# Altium PCB MIFA.PcbDoc (part 1 of 5)
Units mm, origin at the board's own origin, x right, y up, seen from the top; angles counter-clockwise.
Board outline 61 x 65 mm, 6 copper layers (Top Layer, Mid-Layer 1, Mid-Layer 2, Mid-Layer 3, Mid-Layer 4, Bottom Layer), stack 1.538 mm thick; 269 components, 171 nets, 1183 pads, 797 vias.
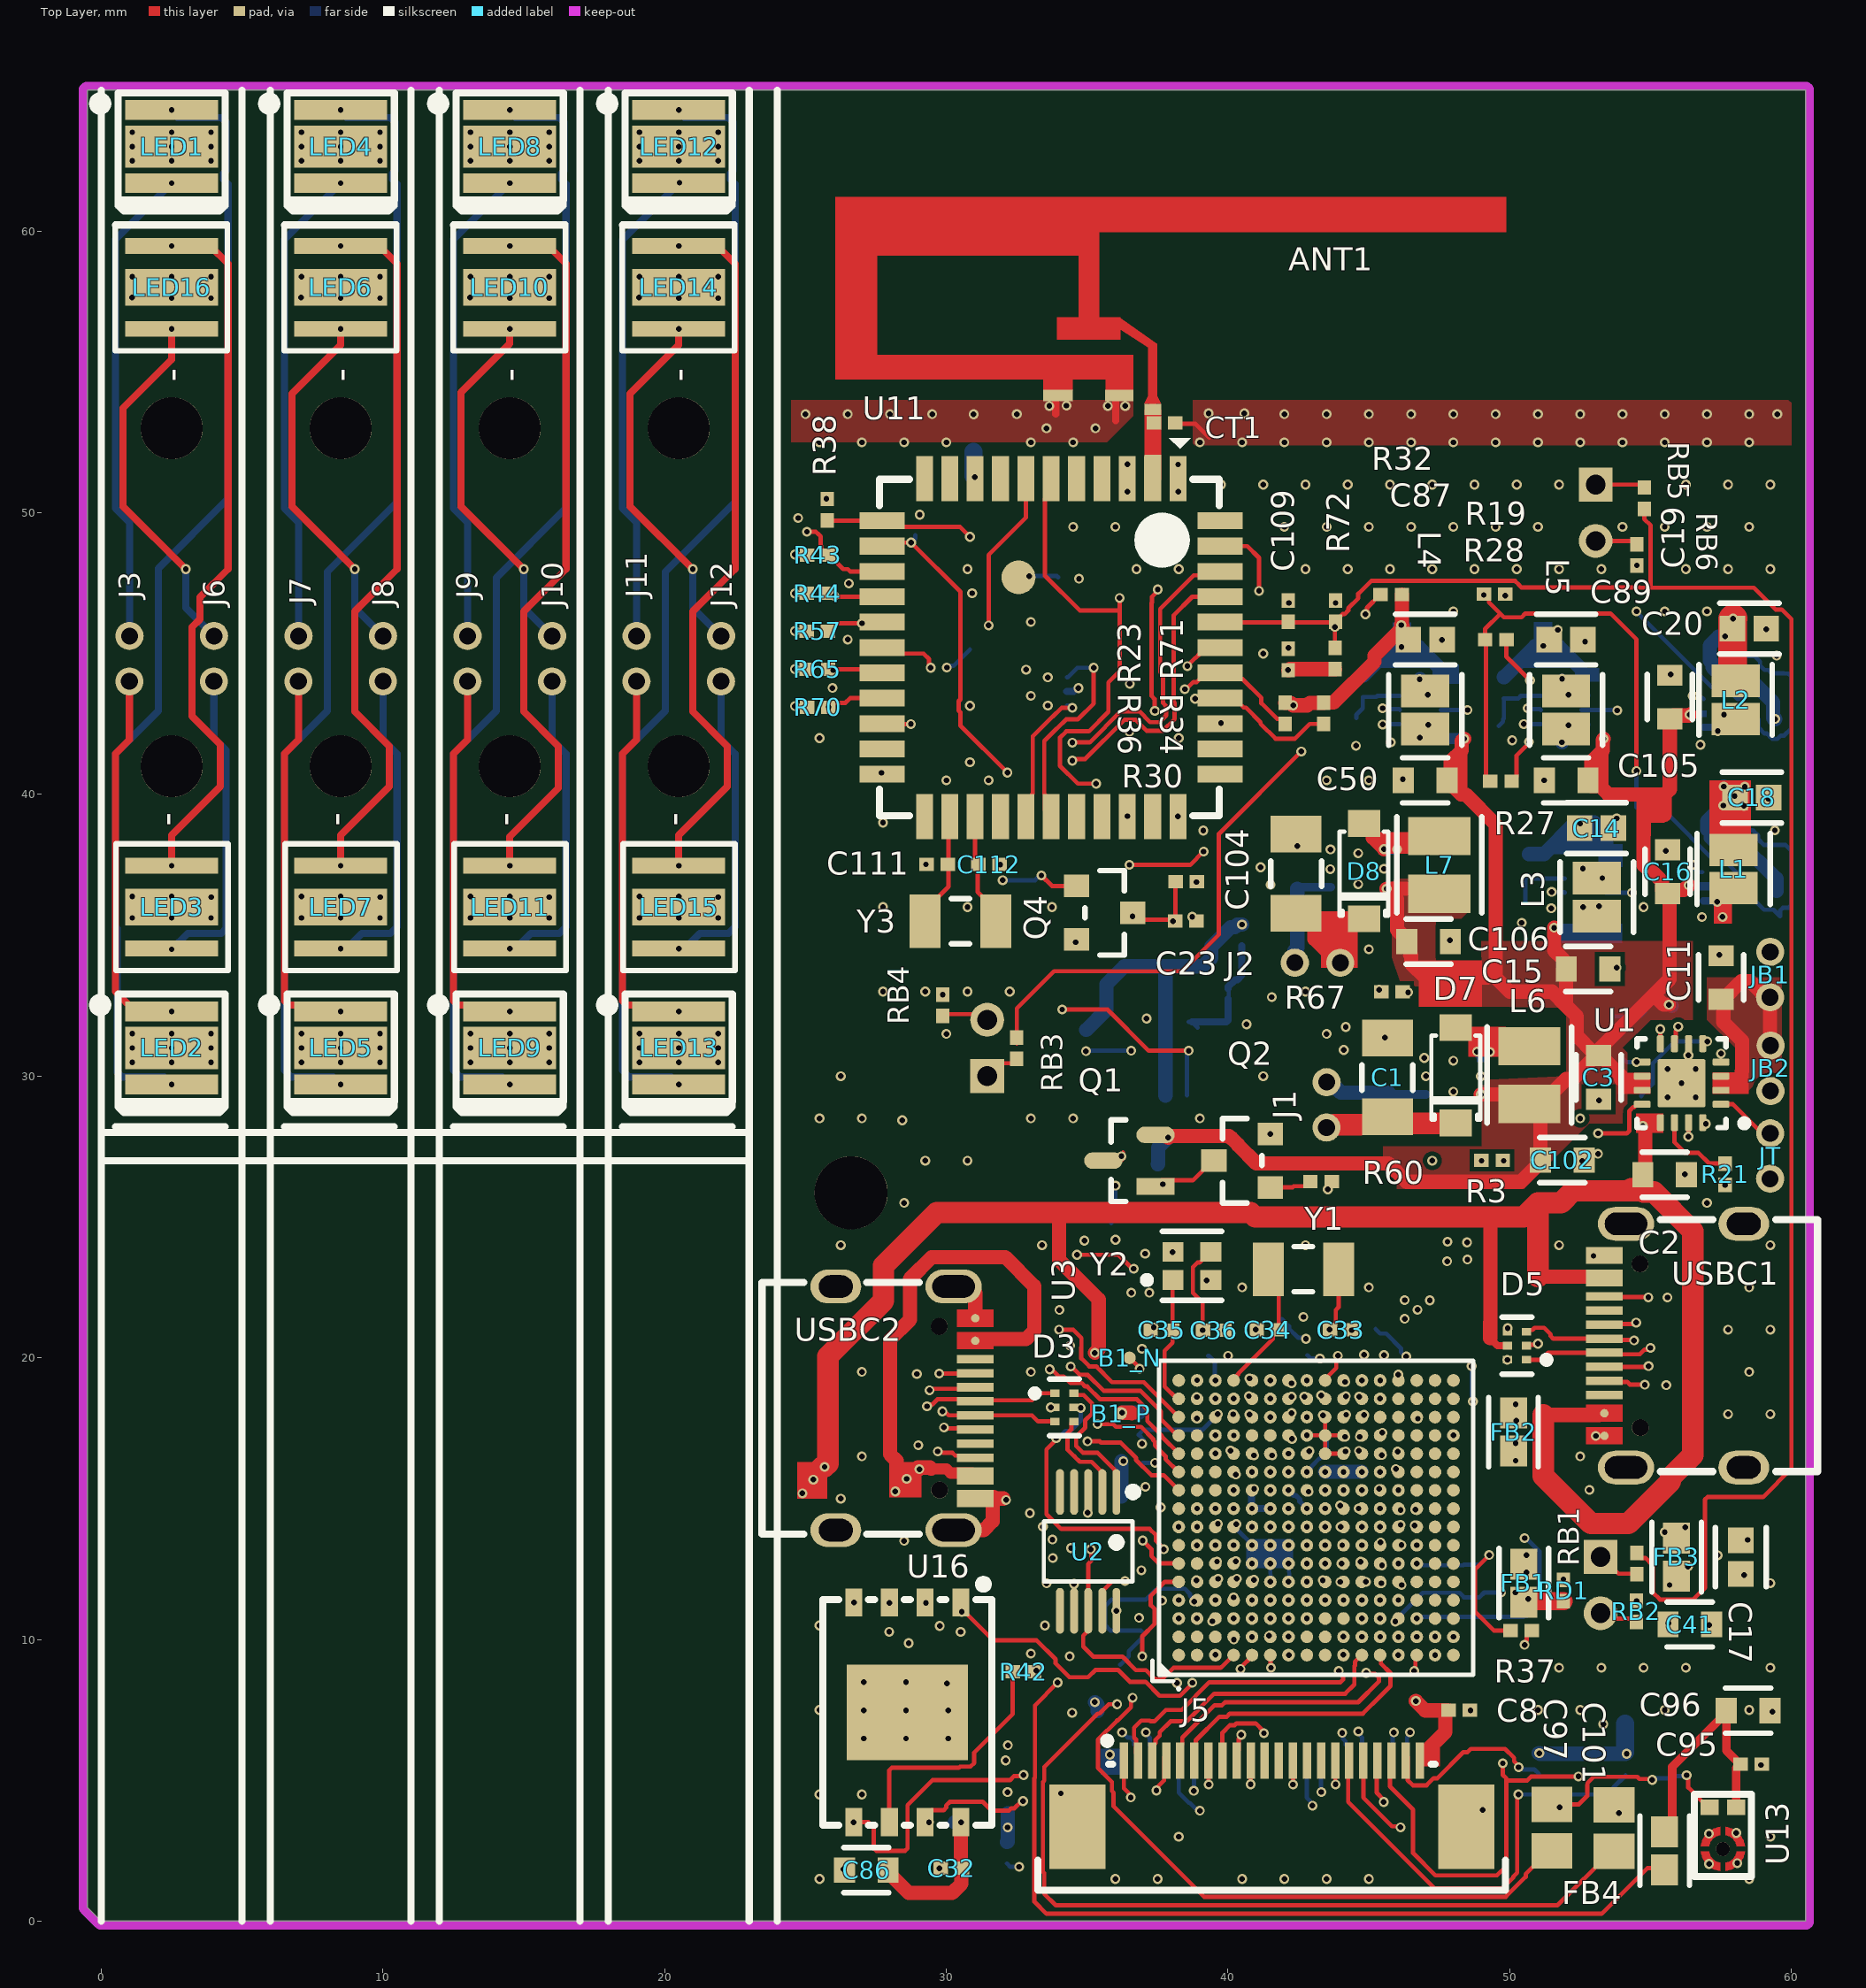
[diagram p0: Top Layer view]
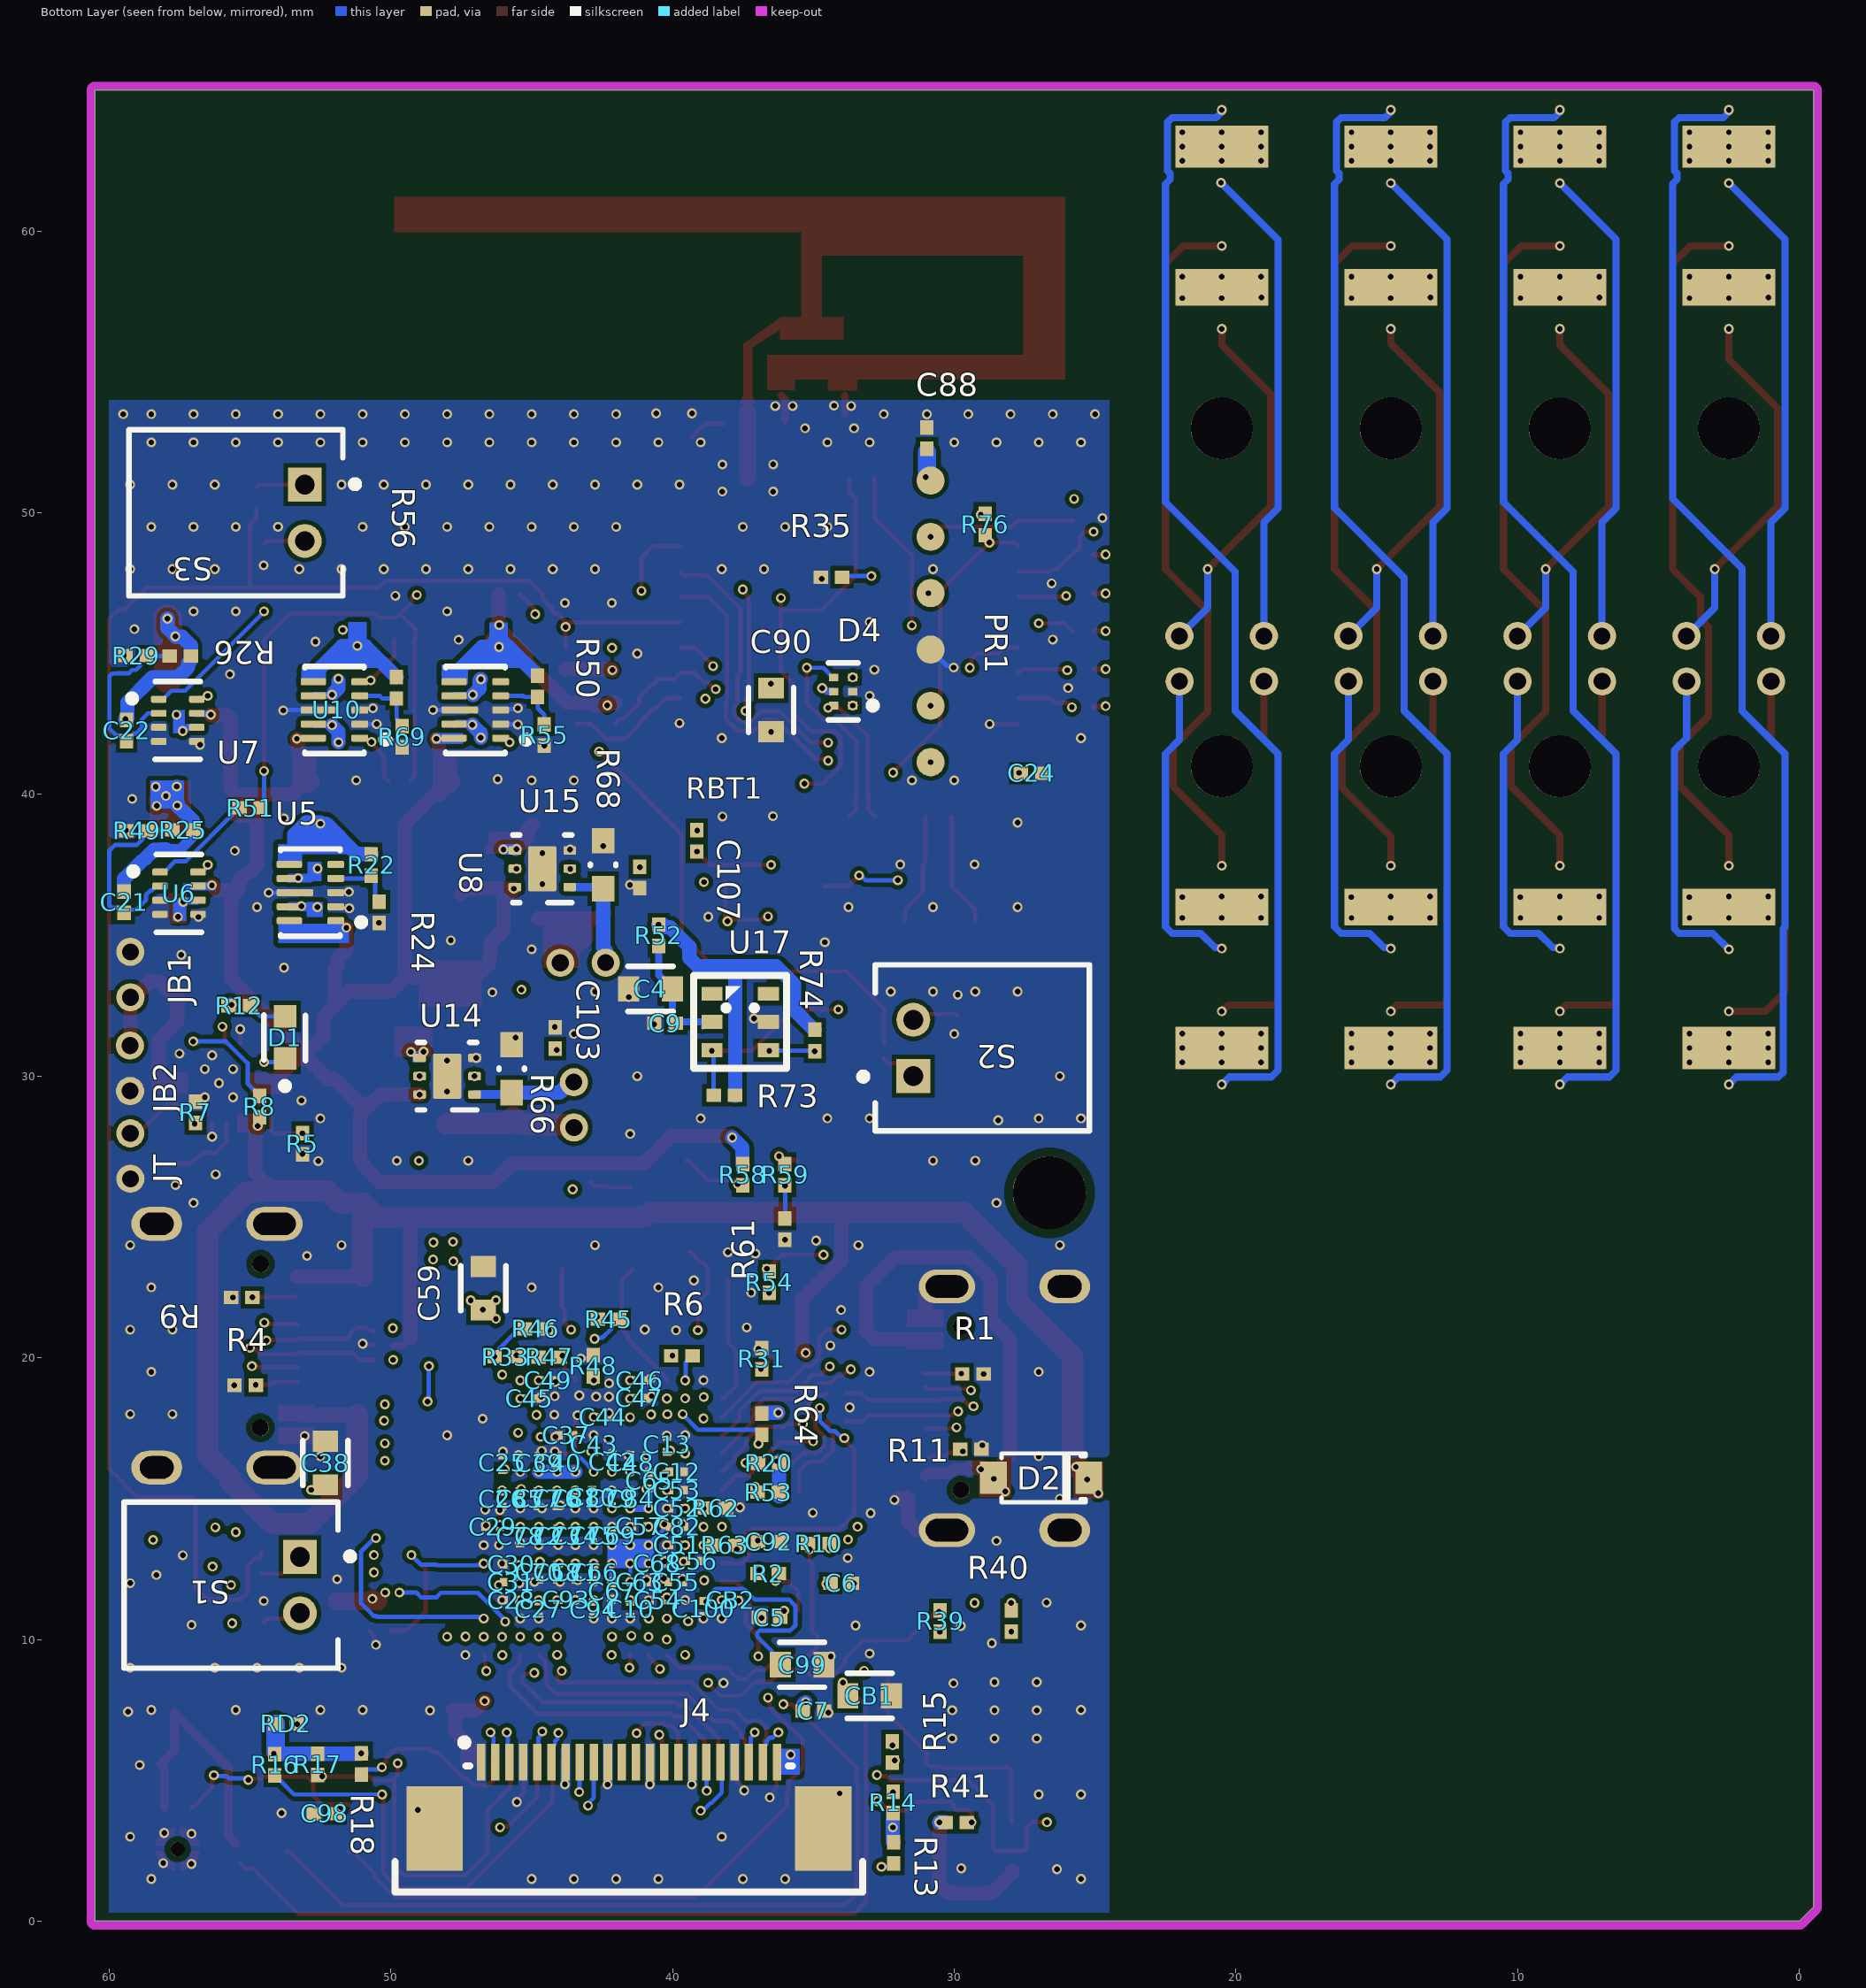
[diagram p1: Bottom Layer view, seen from below]
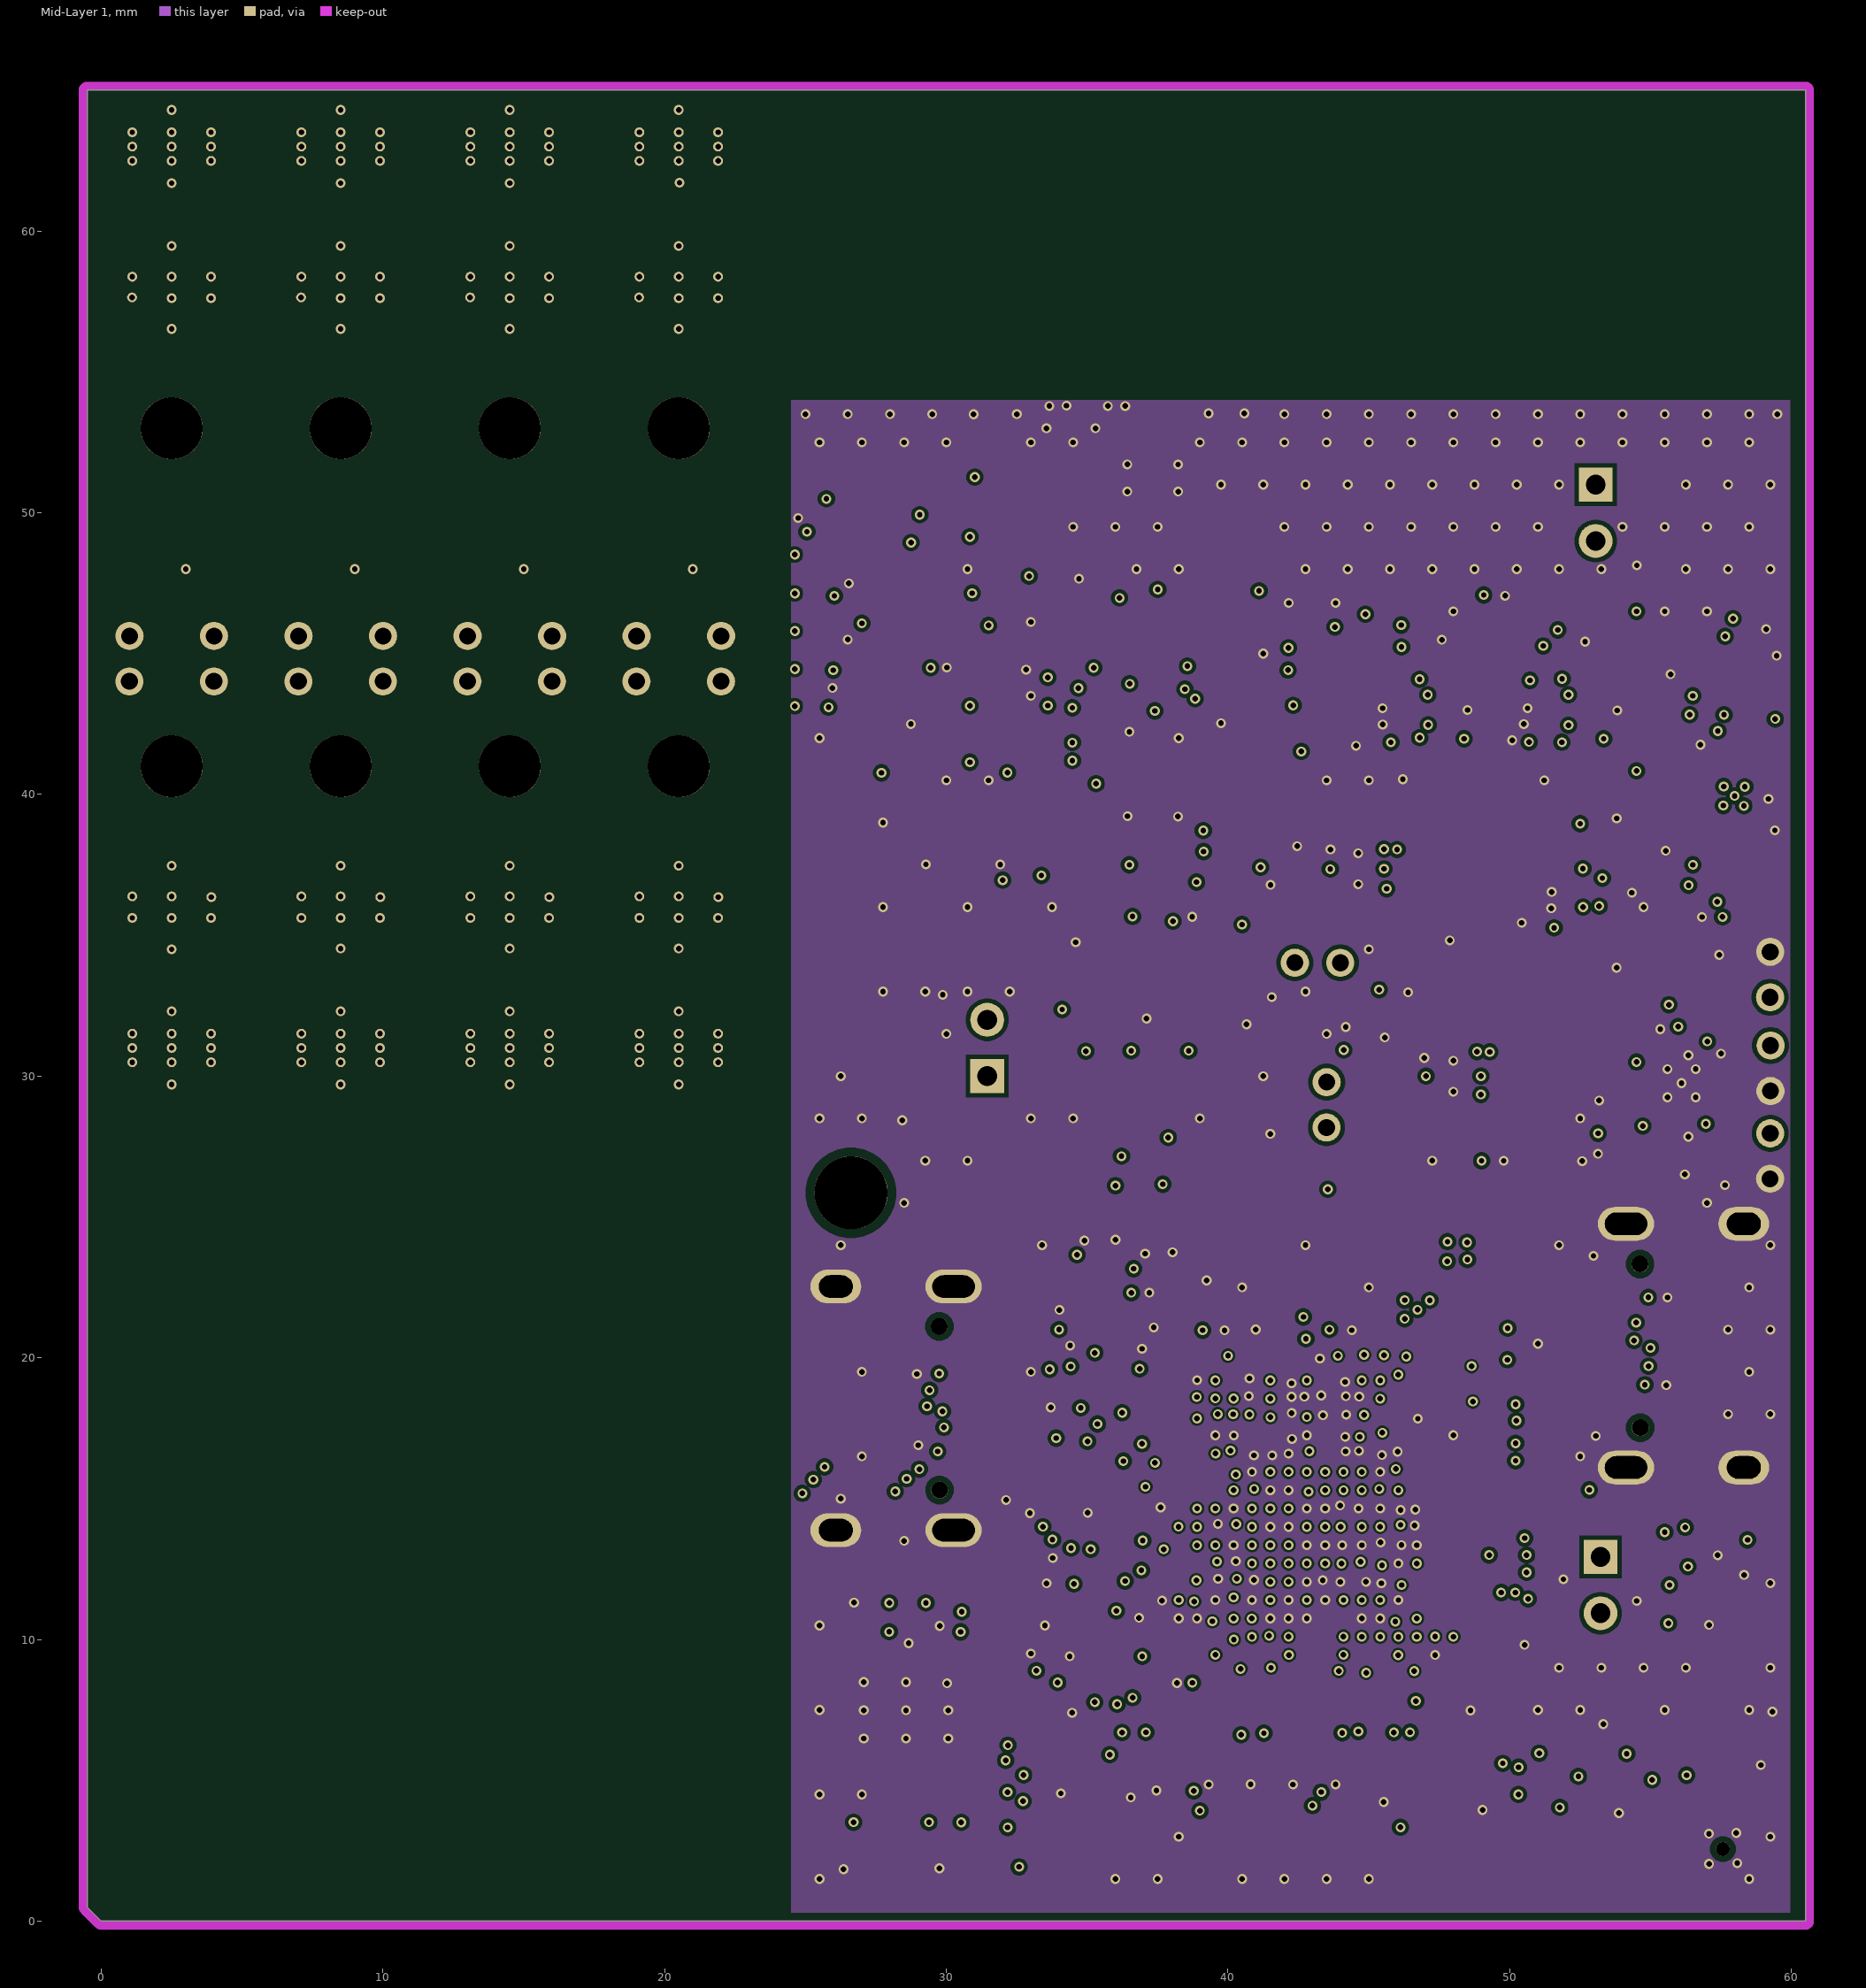
[diagram p2: Mid-Layer 1]
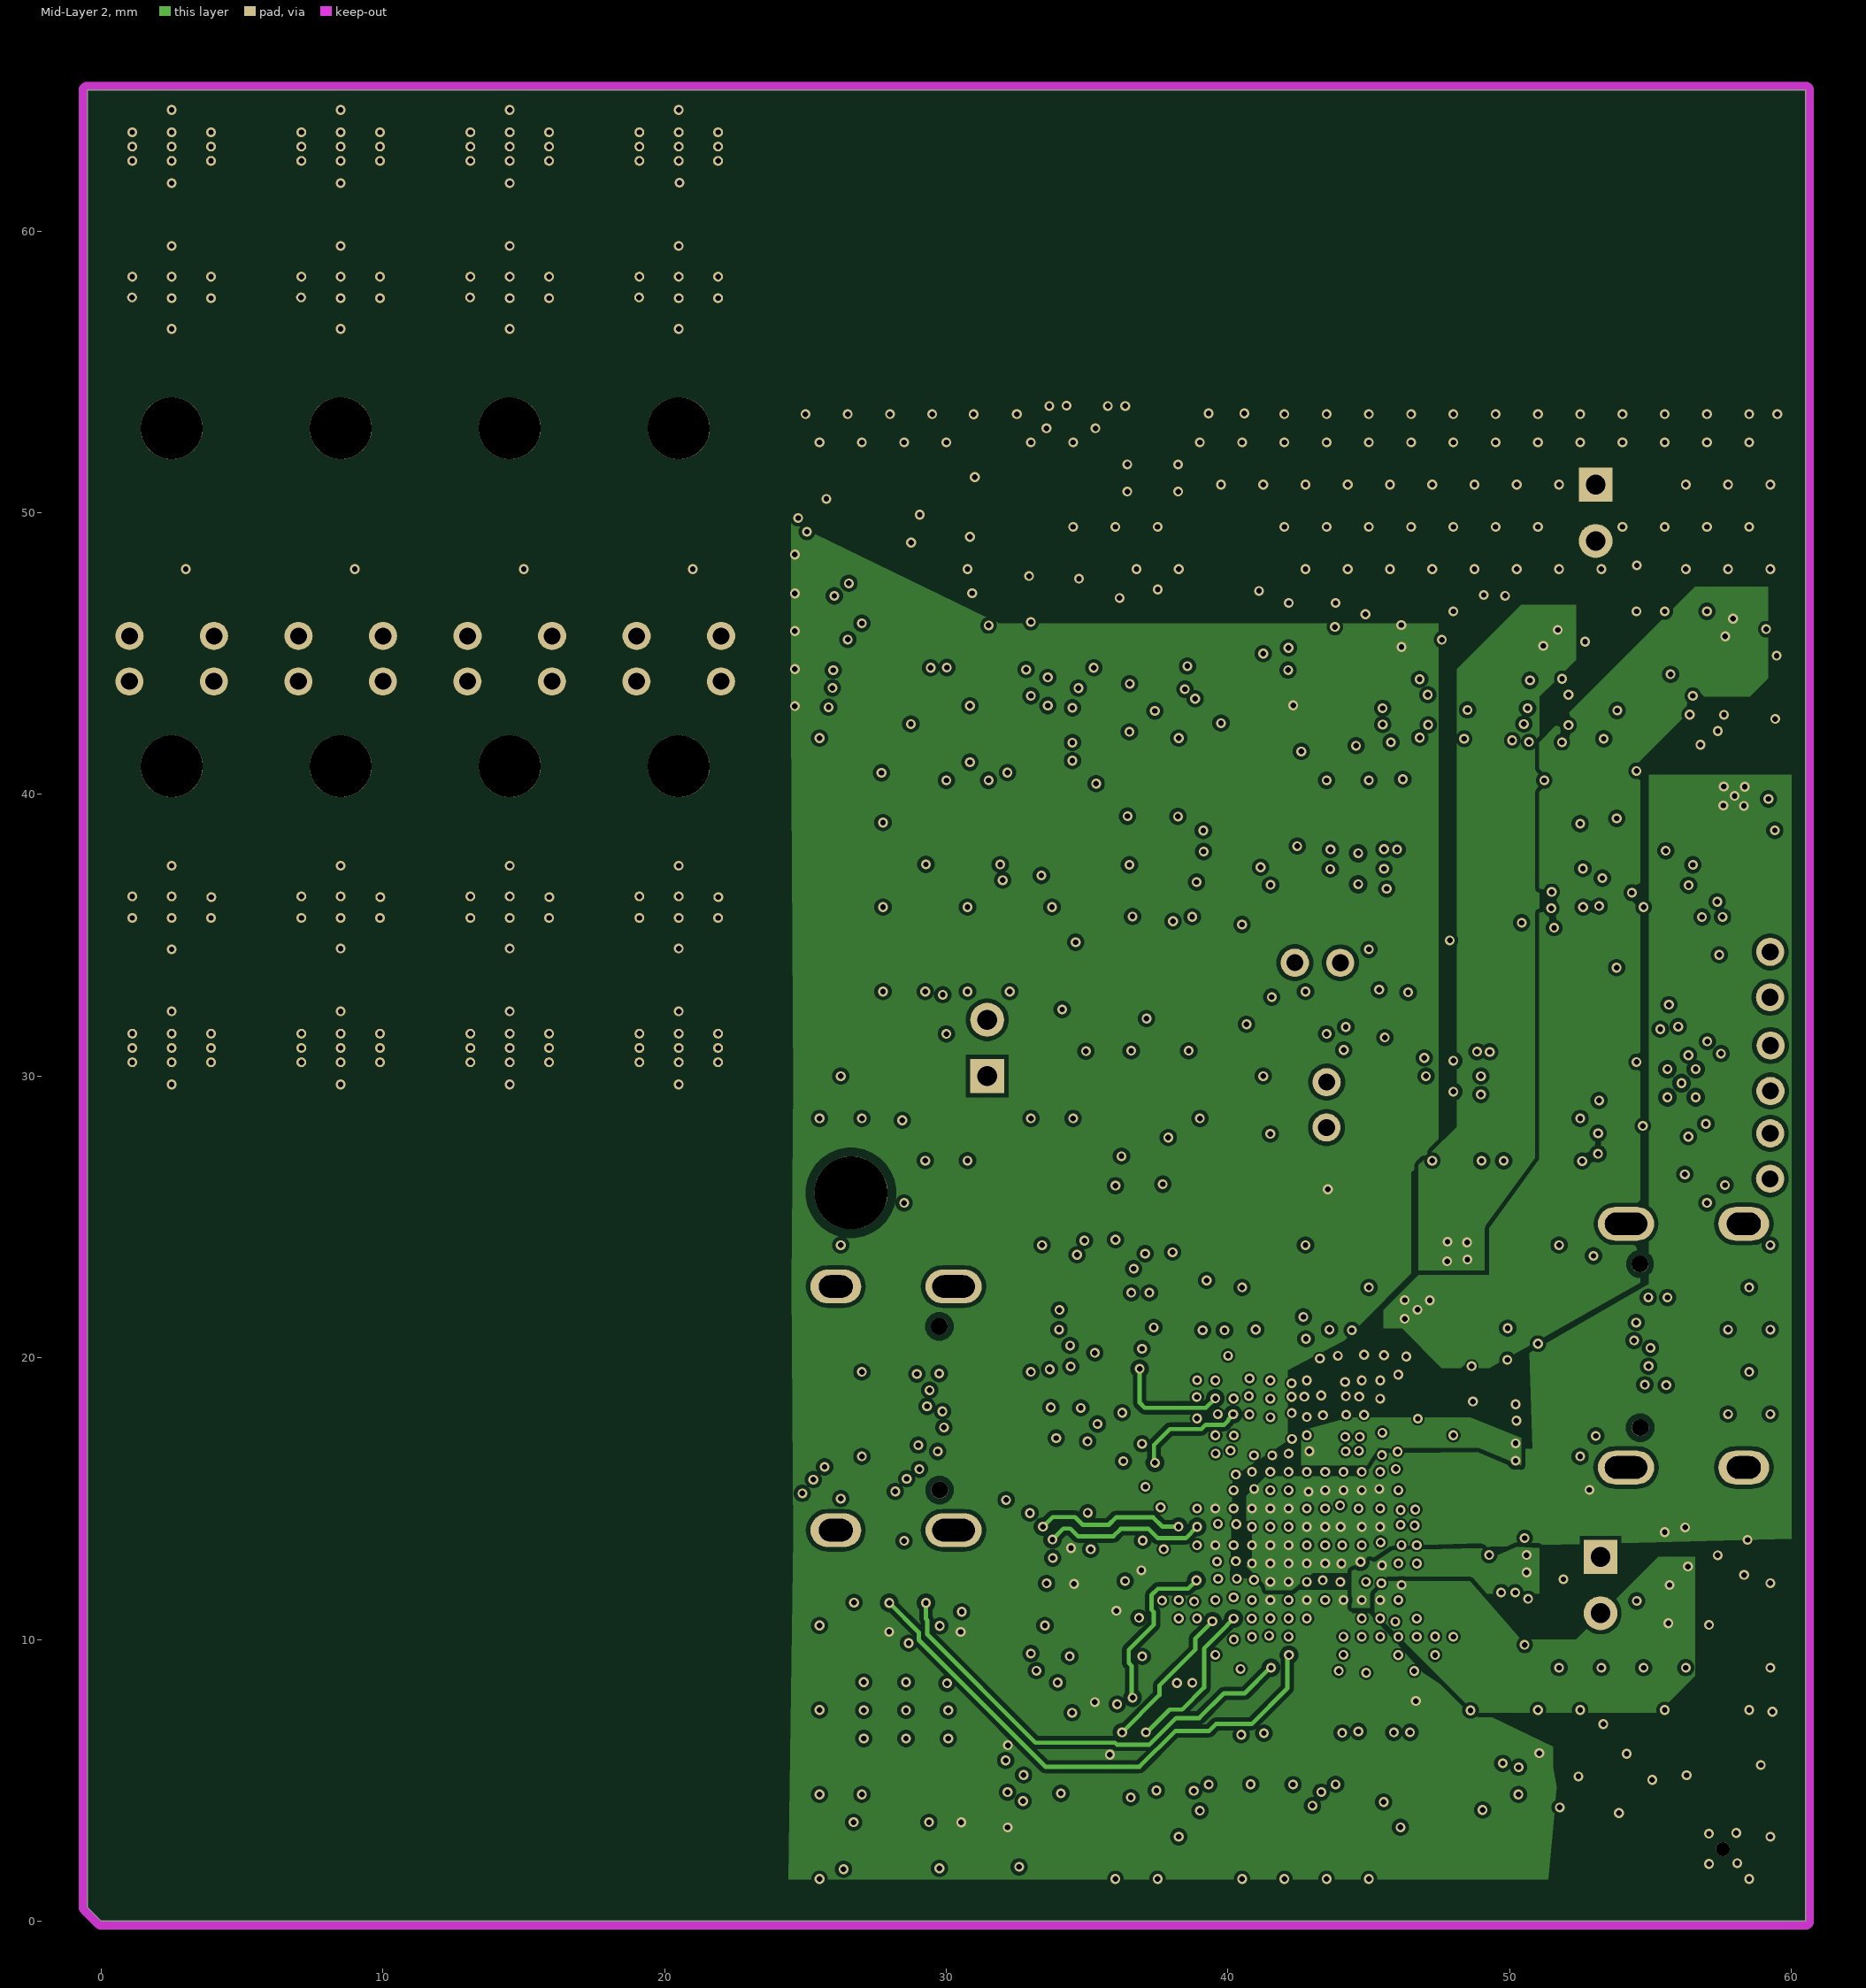
[diagram p3: Mid-Layer 2]
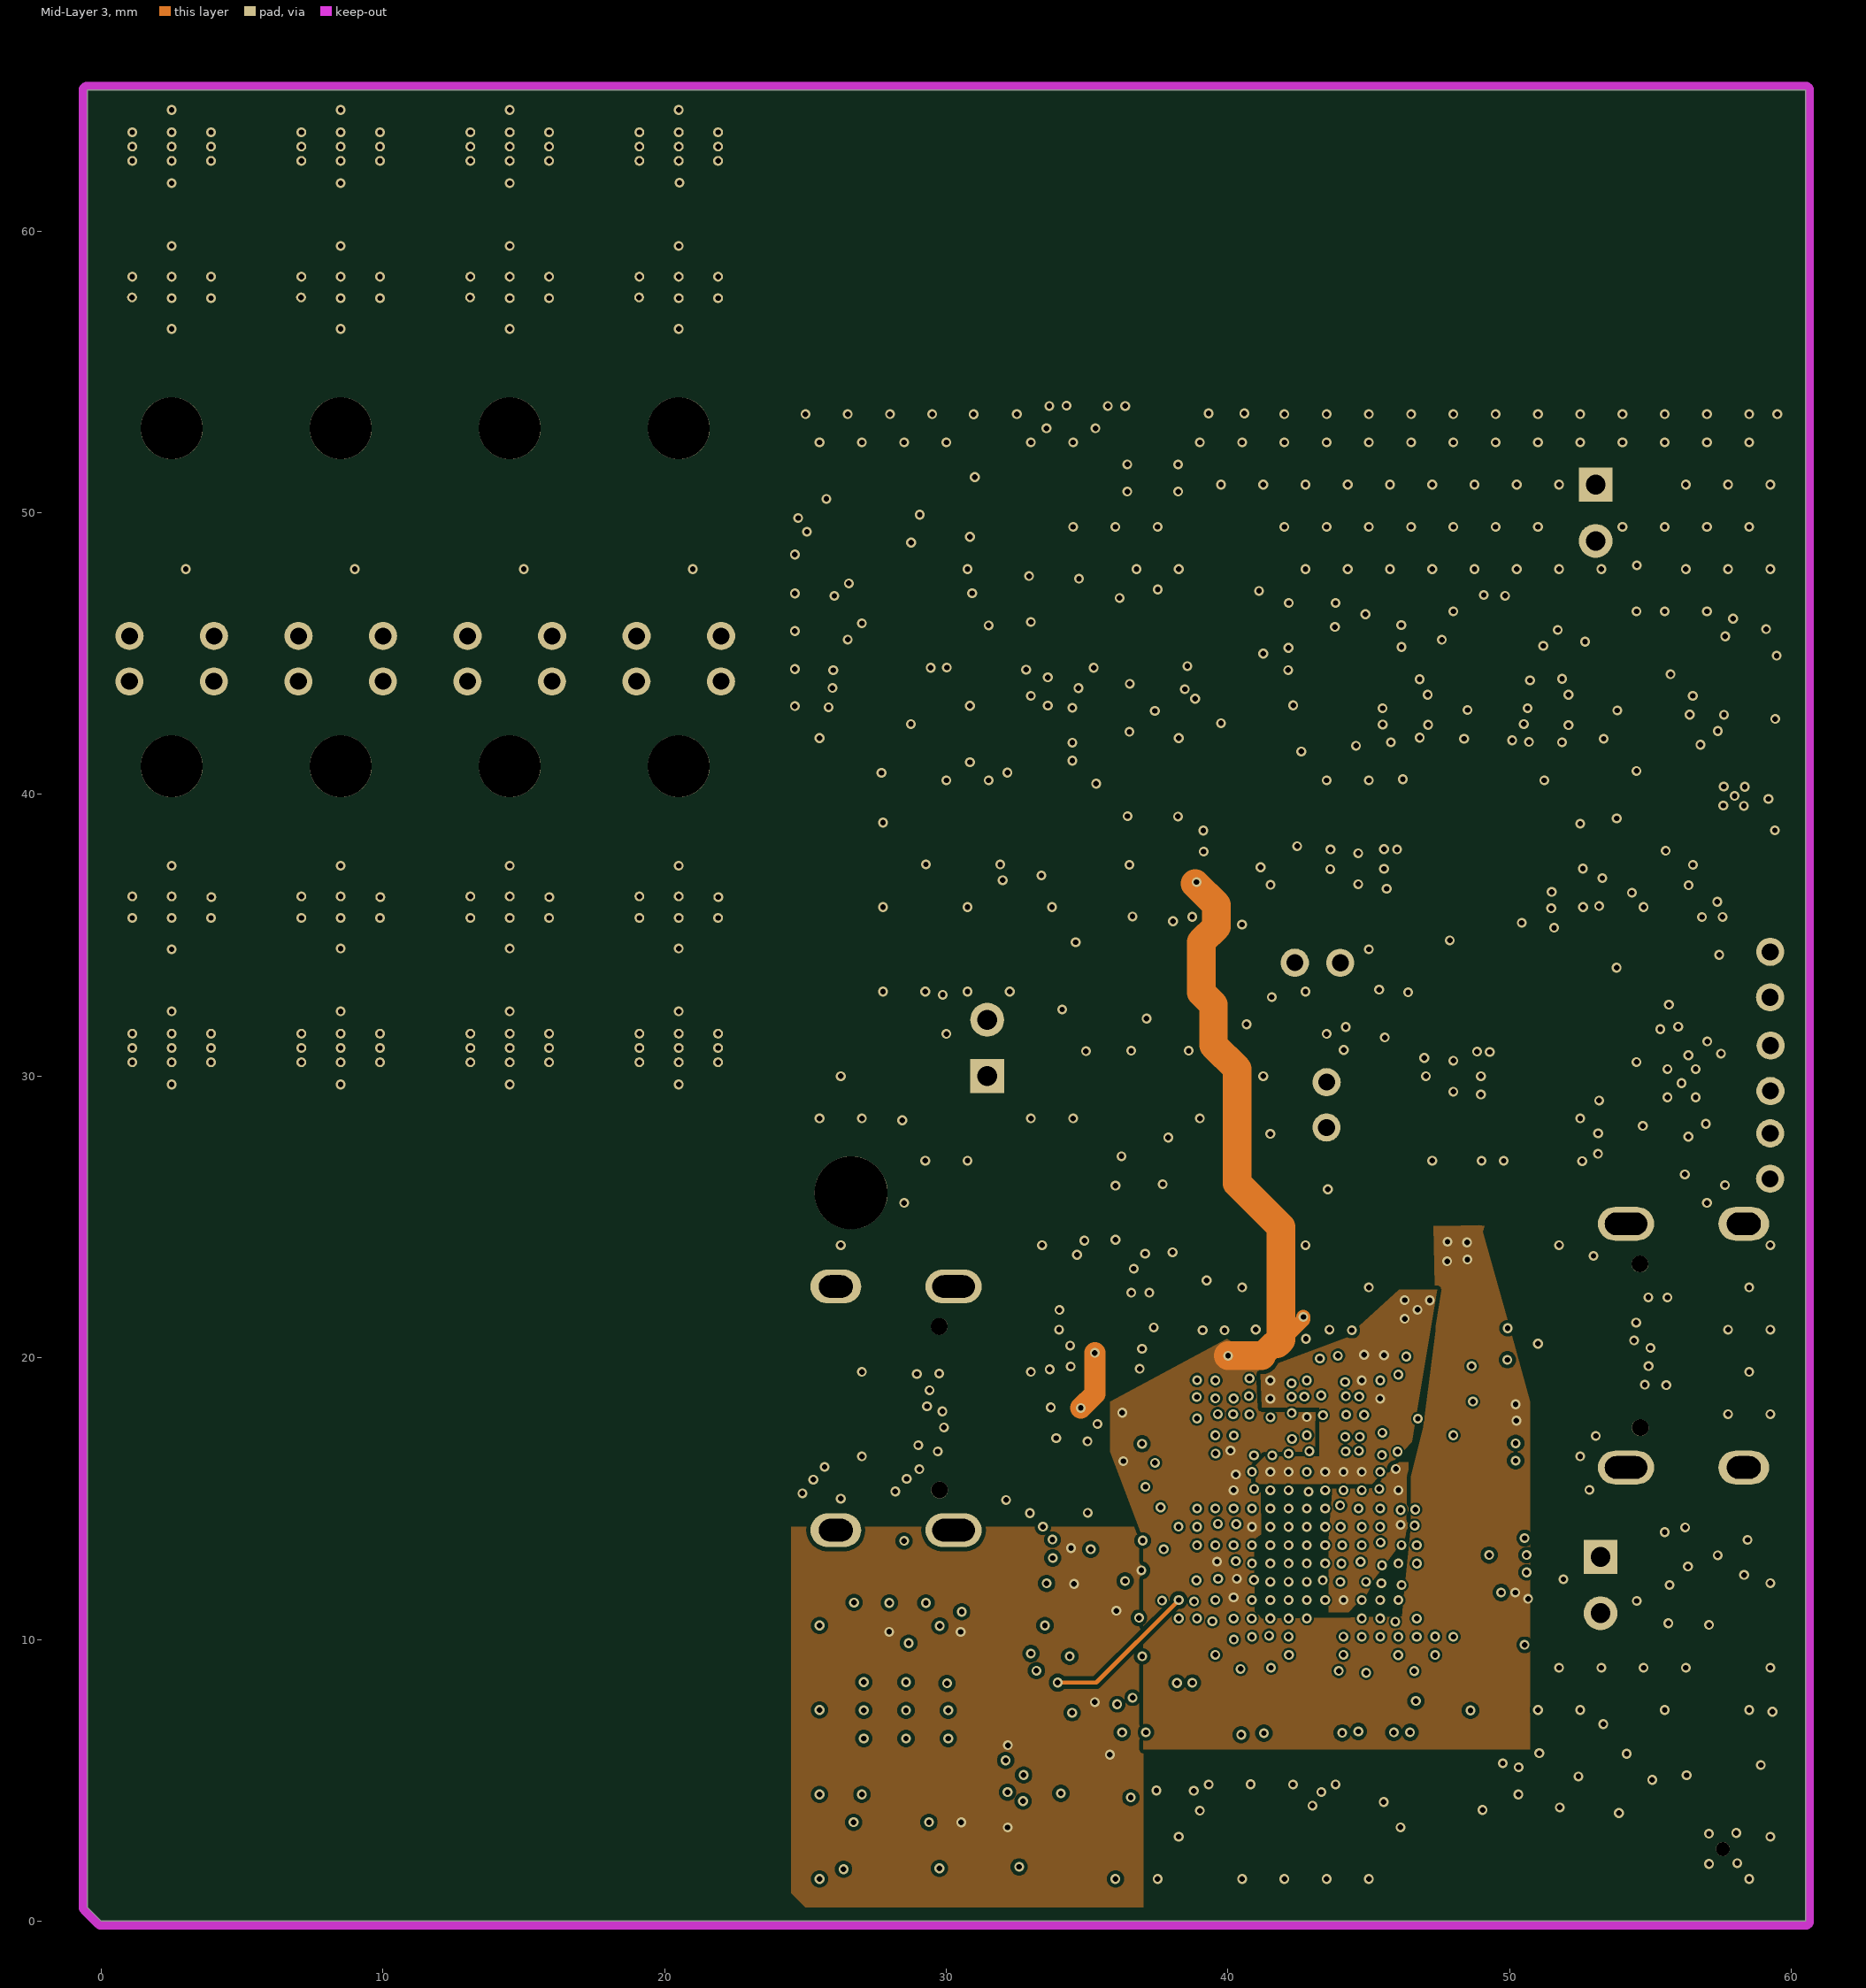
[diagram p4: Mid-Layer 3]
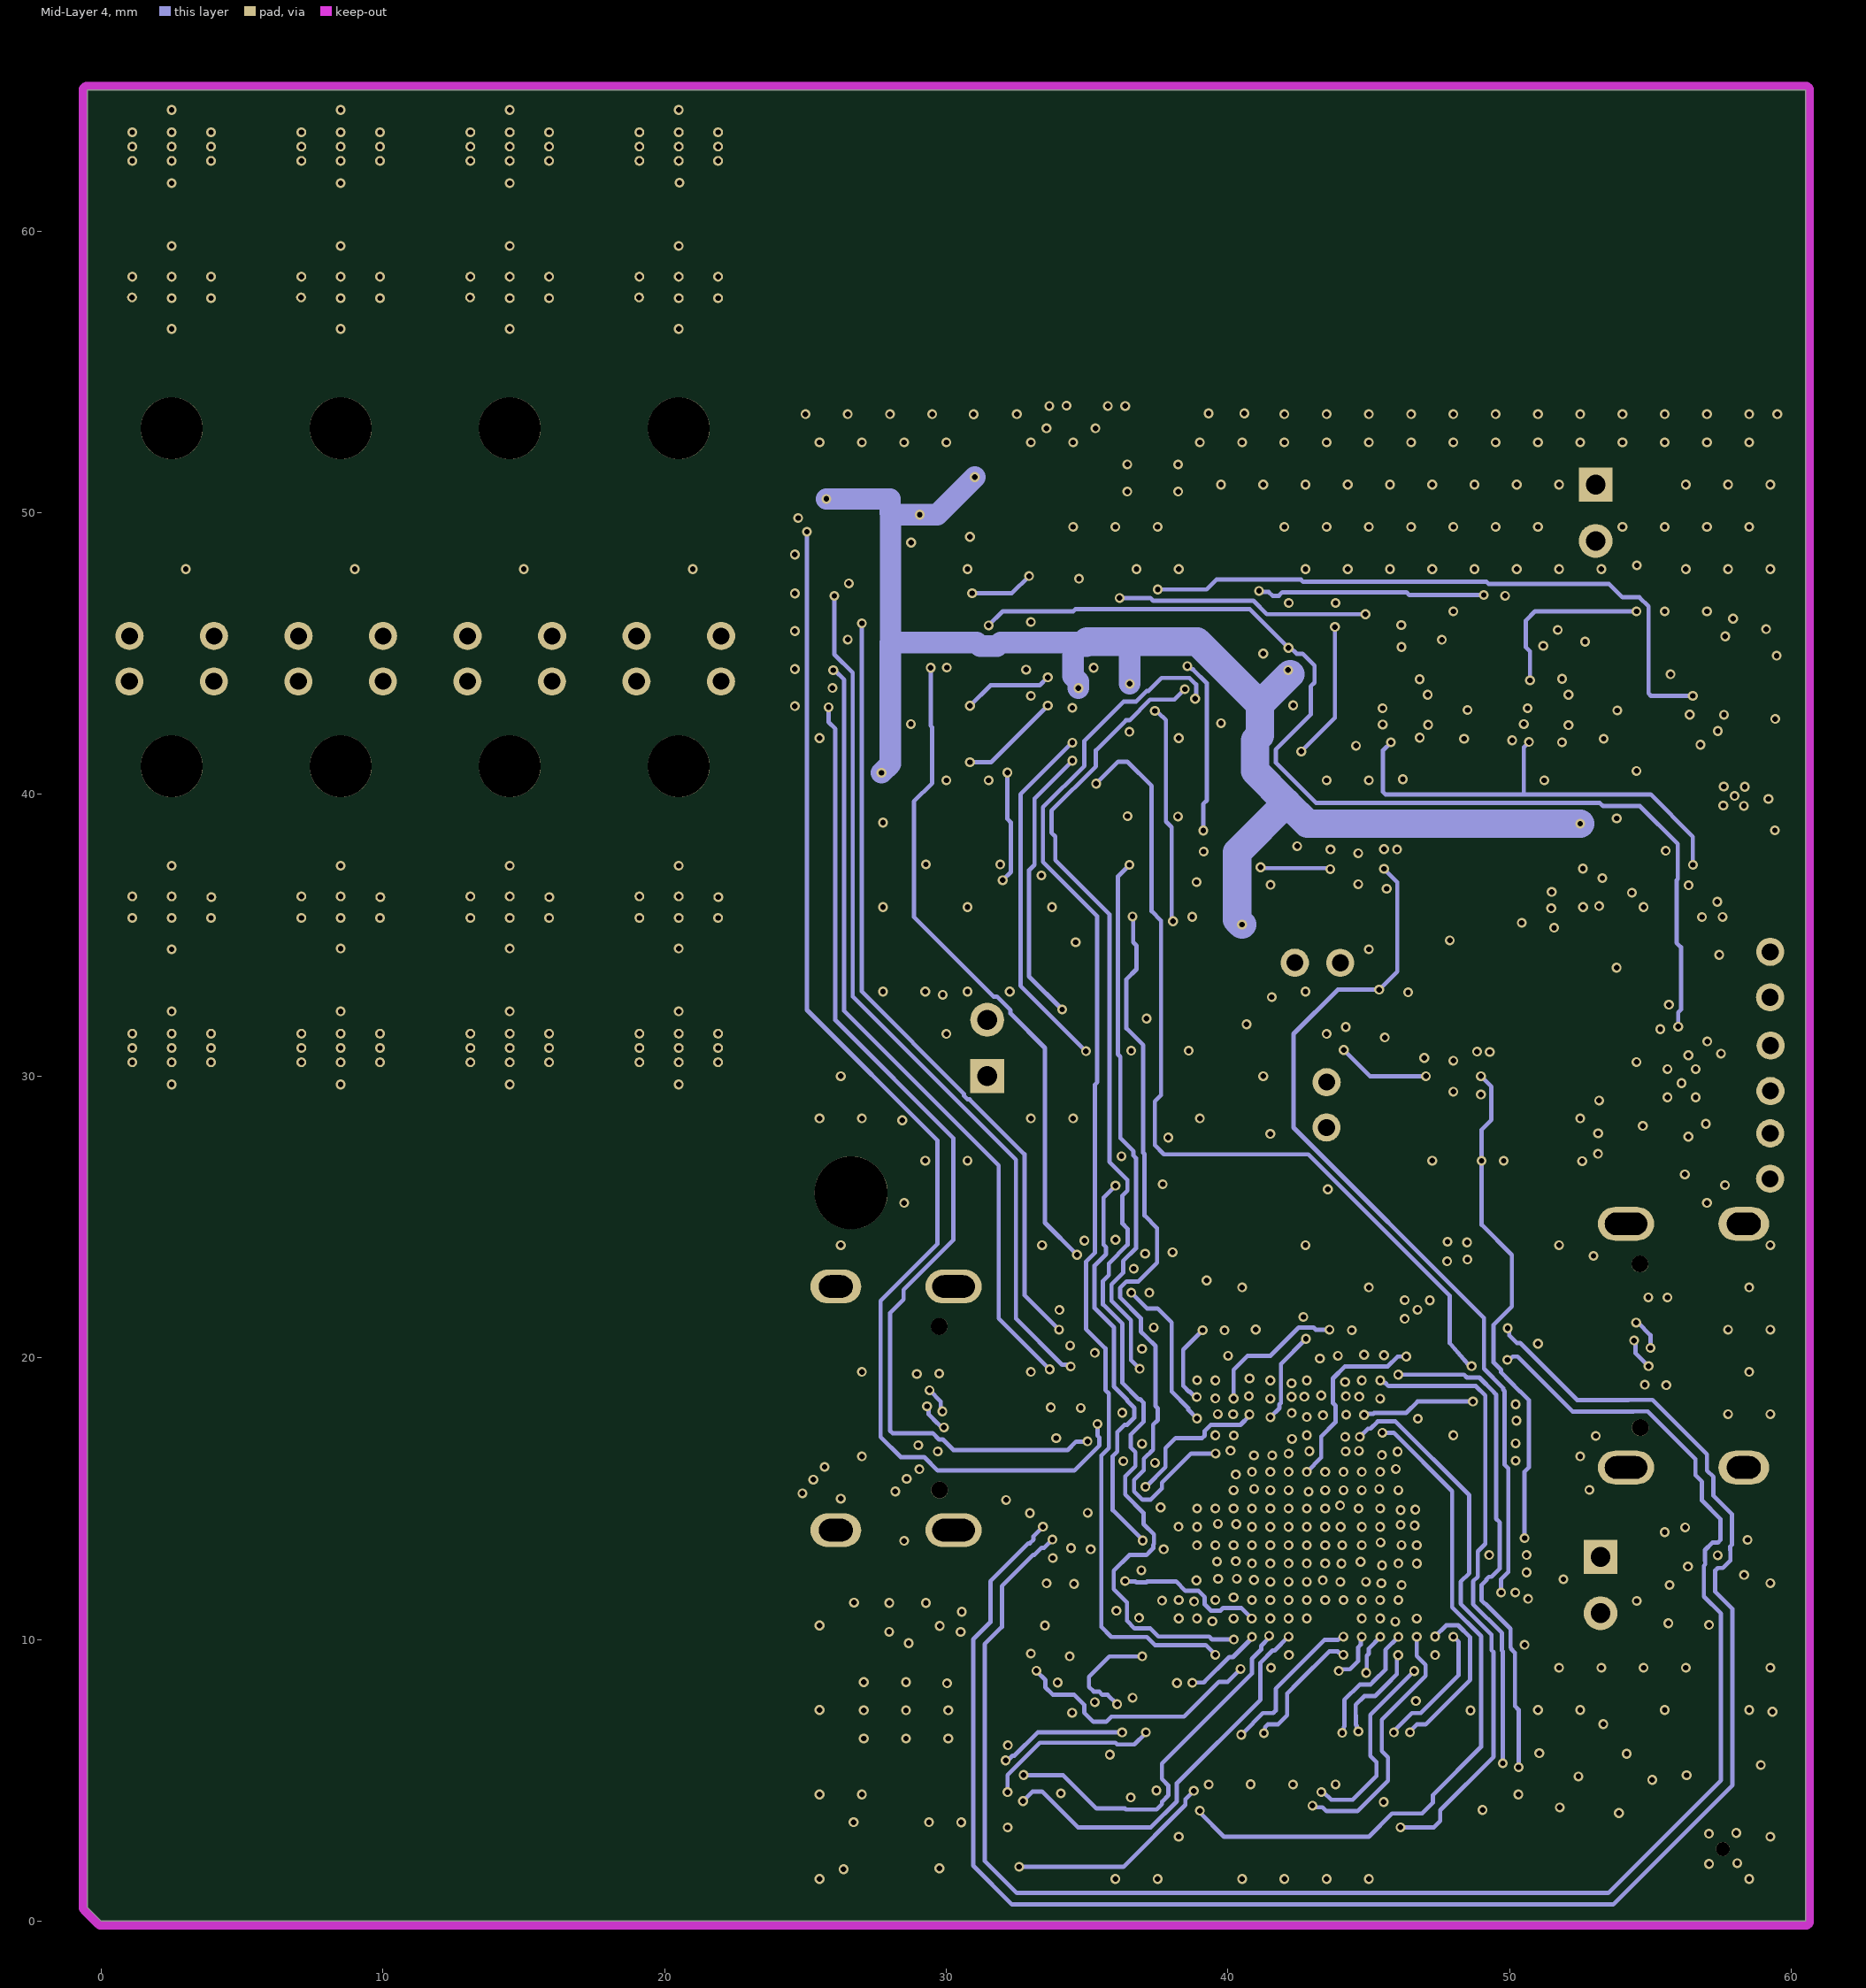
[diagram p5: Mid-Layer 4]
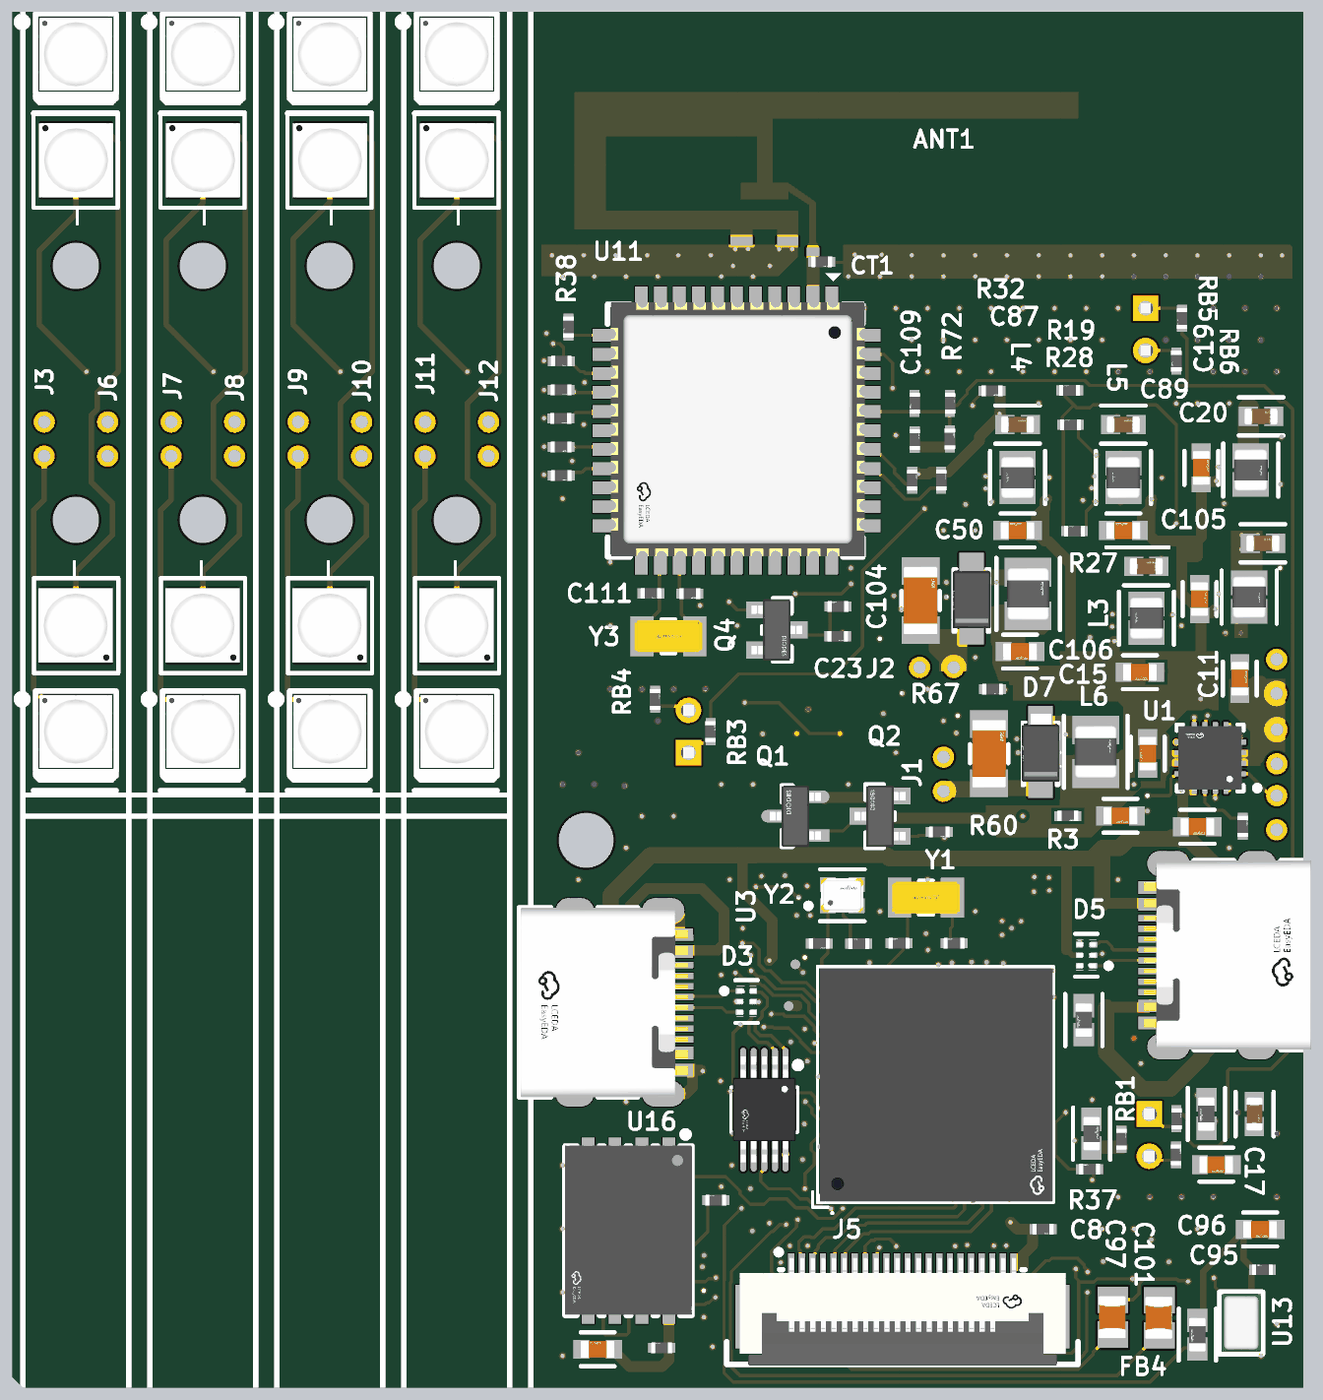
[diagram p8: 3D render of the assembled board from above, using the file's embedded part models]
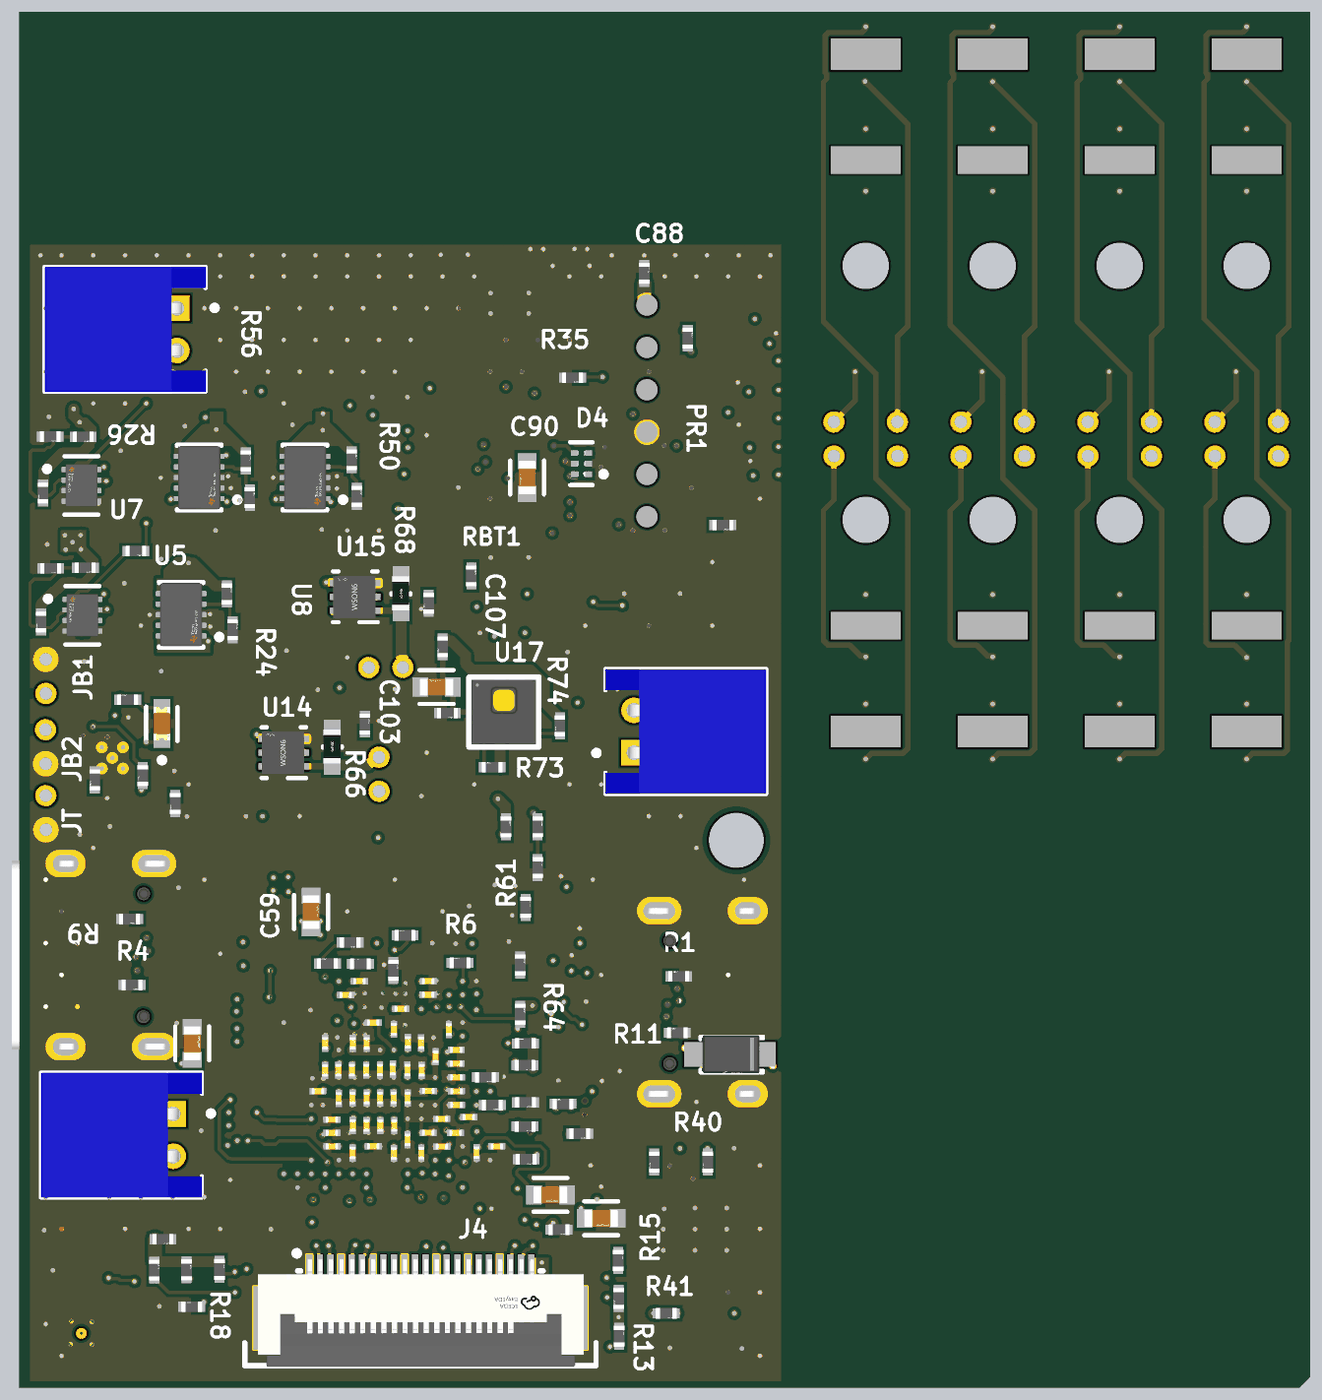
[diagram p9: 3D render of the assembled board from below, using the file's embedded part models]

## Layer stack, top to bottom
Top Solder: solder mask 0.0305, Solder Resist, Dk 3.8
Top Layer: signal copper 0.035
Dielectric 1: prepreg 0.0994, PP-3313, Dk 3.95
Mid-Layer 1: signal copper 0.0152
Dielectric 2: core 0.55, Core-055, Dk 4.4
Mid-Layer 2: signal copper 0.0152
Dielectric 3: prepreg 0.1088, PP-2116, Dk 4
Mid-Layer 3: signal copper 0.0152
Dielectric 4: core 0.55, Core-055, Dk 4.4
Mid-Layer 4: signal copper 0.0152
Dielectric 5: prepreg 0.0994, PP-3313, Dk 3.95
Bottom Layer: signal copper 0.035
Bottom Solder: solder mask 0.0305, Solder Resist, Dk 3.8

## Board outline
0,0 -0.5,0.5 -0.5,65 60.5,65 60.5,0

## Design rules (kind name [scope] priority, off if disabled: settings)
Clearance Clearance_1 [All vs IsPad AND (Name = 'Free-HOLE')] p1: gap=0.3 ignorepadtopadclearanceinfootprint=FALSE
Clearance Clearance_2 [All vs WithinRoom('BGA')] p2: gap=0.15 ignorepadtopadclearanceinfootprint=FALSE except(0.2: Arc-Hole Track-Hole SMDPad-Hole THPad-Hole Via-Hole Text-Hole)
Clearance [All] p3: gap=0.15 ignorepadtopadclearanceinfootprint=FALSE except(0.2: Arc-Hole Track-Hole SMDPad-Hole THPad-Hole Via-Hole Fill-Hole Poly-Hole Region-Hole Text-Hole)
DiffPairsRouting [All] p1: maxlimit=0.254 minlimit=0.254 mostfreqgap=0.254 toplayer_minwidth=0.152 toplayer_maxwidth=0.381 toplayer_prefwidth=0.152 midlayer1_minwidth=0.152 midlayer1_maxwidth=0.381 midlayer1_prefwidth=0.152 midlayer2_minwidth=0.152 midlayer2_maxwidth=0.381 midlayer2_prefwidth=0.152 midlayer3_minwidth=0.152 midlayer3_maxwidth=0.381 midlayer3_prefwidth=0.152 midlayer4_minwidth=0.152 midlayer4_maxwidth=0.381 midlayer4_prefwidth=0.152 bottomlayer_minwidth=0.152 bottomlayer_maxwidth=0.381 bottomlayer_prefwidth=0.152 maxuncoupledlength=12.7
HoleSize [All] p1: absolutevalues=TRUE maxlimit=3.515 minlimit=0.2 maxpercent=80.000 minpercent=20.000
HoleToHoleClearance [All] p1: gap=0.251 allowstackedmicrovias=TRUE
MinimumSolderMaskSliver [All] p1: minsoldermaskwidth=0.003
PlaneClearance PlaneClearance_1 [All] p1: clearance=0.102
PolygonConnect [All] p1: connectstyle=Direct reliefconductorwidth=0.254 reliefentries=4 polygonreliefangle="90 Angle" airgapwidth=0.254
RoomDefinition BGA [False] p1: confinementstyle=ConfineIn formatcopy=TRUE lockcomponents=FALSE outline 37,20.5 49,20.5 49,8.5 37,8.5
RoutingVias [All] p1: holewidth=0.2 width=0.35 viastyle="Through Hole" minholewidth=0.2 minwidth=0.35 maxholewidth=0.2 maxwidth=0.35
SilkToSilkClearance [All] p1: silktosilkclearance=0.051
SilkToSolderMaskClearance [IsPad] p1: minsilkscreentomaskgap=0.04 clearancetoexposedcopper=TRUE
SolderMaskExpansion [All] p1: expansion=0.102 istentingtop=FALSE
SupplyNets "Schematic Supply Nets_10" [InNet('1V8_MIPI')] p1: voltage=0.000
SupplyNets "Schematic Supply Nets_9" [InNet('3V3_SLEEP')] p2: voltage=0.000
SupplyNets "Schematic Supply Nets_8" [InNet('0V8_MIPI')] p3: voltage=0.000
SupplyNets "Schematic Supply Nets_7" [InNet('3V3')] p4: voltage=0.000
SupplyNets "Schematic Supply Nets_6" [InNet('VBAT')] p5: voltage=0.000
SupplyNets "Schematic Supply Nets_5" [InNet('1V8_DDR')] p6: voltage=0.000
SupplyNets "Schematic Supply Nets_4" [InNet('VUSB')] p7: voltage=0.000
SupplyNets "Schematic Supply Nets_3" [InNet('1V1')] p8: voltage=0.000
SupplyNets "Schematic Supply Nets_2" [InNet('0V8')] p9: voltage=0.000
SupplyNets "Schematic Supply Nets_1" [InNet('1V8')] p10: voltage=0.000
SupplyNets "Schematic Supply Nets" [InNet('GND')] p11: voltage=0.000
Width [InNet('3V3') or InNet('3V3_SLEEP') or InNet('NetD2_2') or InNet('VUSB') or InNet('BAT') or InNet('VBAT') or InNet('NetL3_1') or InNet('NetL3_2') or InNet('0V8') or InNet('1V1') or InNet('1V8')] p1: maxlimit=3.048 minlimit=0.152 preferedwidth=0.762
Width Width_1 [All] p2: maxlimit=3.81 minlimit=0.152 preferedwidth=0.152
23 further rules are at their usual default settings.

## Classes and differential pairs
differential pair class USB: USB_D USBP_D
differential pair class USBD: AI_D AIP_D
differential pair class CAMC: CAM1_C CAM2_C
differential pair class CAM1: CAM1_D1 CAM2_D1
differential pair class CAM0: CAM1_D0 CAM2_D0
component class WIFI: q
differential pair USBP_D: +USBP_D_P -USBP_D_N
differential pair USB_D: +USB_D_P -USB_D_N
differential pair CAM2_D1: +CAM2_D1_P -CAM2_D1_N
differential pair CAM2_D0: +CAM2_D0_P -CAM2_D0_N
differential pair CAM2_C: +CAM2_C_P -CAM2_C_N
differential pair CAM1_D1: +CAM1_D1_P -CAM1_D1_N
differential pair CAM1_D0: +CAM1_D0_P -CAM1_D0_N
differential pair CAM1_C: +CAM1_C_P -CAM1_C_N
differential pair AIP_D: +AIP_D_P -AIP_D_N
differential pair AI_D: +AI_D_P -AI_D_N

## Components (designator, comment, footprint, x,y, rotation, side; value= is the part's Value field where it differs from the comment)
ANT1 "MIFI" IFA_MAGUS 32.353,56.811 r0 top net-tie
B1_N "TESTP" TESTP 36.475,20 r90 top
B1_P "TESTP" TESTP 36.16,18.024 r90 top
C1 "1uF 50V 1206" FP-1206-L_3_2_0_2-W_1_6_0-IPC_B 45.657,29.952 r90 top value=1uF
C2 "10uF GRM188R61A106ME69D" FP-GRM188-0_15-MFG 55.5,26.5 r0 top value=10uF
C3 "10uF GRM188R61A106ME69D" FP-GRM188-0_15-MFG 53.15,29.955 r270 top value=10uF
C4 "10uF GRM188R61A106ME69D" FP-GRM188-0_15-MFG 40.781,33.1 r0 bottom value=10uF
C5 "100n" CAP_0402 36.551,10.78 r180 bottom value=100nF
C6 "100n" CAP_0402 34.014,11.996 r180 bottom value=100nF
C7 "100n" CAP_0402 34.995,7.457 r180 bottom value=100nF
C8 "100n" CAP_0402 48.207,7.484 r0 top value=100nF
C9 "100n" CAP_0402 40.267,31.869 r180 bottom value=100nF
C10 "100n 0201" CAP_0201 41.499,11.074 r270 bottom value=100nF
C11 "10uF GRM188R61A106ME69D" FP-GRM188-0_15-MFG 57.5,33.5 r90 top value=10uF
C12 "100n 0201" CAP_0201 39.85,15.956 r180 bottom value=100nF
C13 "100n 0201" CAP_0201 40.2,16.921 r90 bottom value=100nF
C14 "22uF GRM188R60J226MEA0J" FP-GRM188-0_2-IPC_C 53.081,38.803 r0 top value=22uF
C15 "10uF GRM188R61A106ME69D" FP-GRM188-0_15-MFG 52.782,33.8 r0 top value=10uF
C16 "10uF GRM188R61A106ME69D" FP-GRM188-0_15-MFG 55.603,37.257 r90 top value=10uF
C17 "22uF GRM188R60J226MEA0J" FP-GRM188-0_2-IPC_C 58.2,12.925 r270 top value=22uF
C18 "22uF GRM188R60J226MEA0J" FP-GRM188-0_2-IPC_C 58.594,39.891 r0 top value=22uF
C19 "10uF GRM188R61A106ME69D" FP-GRM188-0_15-MFG 55.684,43.457 r90 top value=10uF
C20 "22uF GRM188R60J226MEA0J" FP-GRM188-0_2-IPC_C 58.507,45.886 r0 top value=22uF
C21 "100pf" CAP_0402 59.471,36.175 r270 bottom value=100pF
C22 "100pf" CAP_0402 59.379,42.27 r270 bottom value=100pF
C23 "100n" CAP_0402 38.5,35.5 r0 top value=100nF
C24 "100n" CAP_0402 27.252,40.752 r180 bottom value=100nF
C25 "100n 0201" CAP_0201 46.047,16.273 r90 bottom value=100nF
C26 "100n 0201" CAP_0201 46.047,14.987 r270 bottom value=100nF
C27 "100n 0201" CAP_0201 44.747,11.087 r270 bottom value=100nF
C28 "100n 0201" CAP_0201 45.722,11.398 r0 bottom value=100nF
C29 "100n 0201" CAP_0201 46.386,14.004 r0 bottom value=100nF
C30 "100n 0201" CAP_0201 45.727,12.662 r0 bottom value=100nF
C31 "100n 0201" CAP_0201 45.728,12.039 r180 bottom value=100nF
C32 "100n" CAP_0402 30.183,1.882 r180 top value=100nF
C33 "20p" CAP_0402 44,21 r180 top value=20pF
C34 "20p" CAP_0402 41.4,21 r180 top value=20pF
C35 "12p" CAP_0402 37.631,20.979 r0 top value=12pF
C36 "12p" CAP_0402 39.498,20.979 r180 top value=12pF
C37 "100n 0201" CAP_0201 43.775,17.246 r0 bottom value=100nF
C38 "10uF GRM188R61A106ME69D" FP-GRM188-0_15-MFG 52.326,16.267 r90 bottom value=10uF
C39 "100n 0201" CAP_0201 44.742,16.262 r90 bottom value=100nF
C40 "100n 0201" CAP_0201 44.085,16.266 r90 bottom value=100nF
C41 "10uF GRM188R61A106ME69D" FP-GRM188-0_15-MFG 56.392,10.536 r0 top value=10uF
C42 "100n 0201" CAP_0201 42.136,16.308 r90 bottom value=100nF
C43 "100n 0201" CAP_0201 42.797,16.927 r90 bottom value=100nF
C44 "100n 0201" CAP_0201 42.477,17.899 r180 bottom value=100nF
C45 "100n 0201" CAP_0201 45.076,18.552 r180 bottom value=100nF
C46 "100n 0201" CAP_0201 41.178,19.206 r180 bottom value=100nF
C47 "100n 0201" CAP_0201 41.18,18.564 r180 bottom value=100nF
C48 "100n 0201" CAP_0201 41.509,16.283 r90 bottom value=100nF
C49 "100n 0201" CAP_0201 44.425,19.206 r180 bottom value=100nF
C50 "10uF GRM188R61A106ME69D" FP-GRM188-0_15-MFG 47,40.5 r180 top value=10uF
C51 "100n 0201" CAP_0201 39.842,13.355 r0 bottom value=100nF
C52 "100n 0201" CAP_0201 39.844,14.66 r0 bottom value=100nF
C53 "100n 0201" CAP_0201 39.851,15.308 r180 bottom value=100nF
C54 "100n 0201" CAP_0201 40.529,11.389 r0 bottom value=100nF
C55 "100n 0201" CAP_0201 39.886,12.038 r180 bottom value=100nF
C56 "100n 0201" CAP_0201 39.254,12.785 r180 bottom value=100nF
C57 "100n 0201" CAP_0201 41.164,14.019 r0 bottom value=100nF
C58 "100n 0201" CAP_0201 44.091,12.38 r270 bottom value=100nF
C59 "10uF GRM188R61A106ME69D" FP-GRM188-0_15-MFG 46.713,22.47 r90 bottom value=10uF
C63 "100n 0201" CAP_0201 41.177,12.043 r180 bottom value=100nF
C65 "100n 0201" CAP_0201 40.827,15.631 r90 bottom value=100nF
C66 "100n 0201" CAP_0201 42.78,12.38 r270 bottom value=100nF
C67 "100n 0201" CAP_0201 42.152,11.711 r270 bottom value=100nF
C68 "100n 0201" CAP_0201 40.539,12.696 r180 bottom value=100nF
C69 "100n 0201" CAP_0201 42.148,13.682 r90 bottom value=100nF
C70 "100n 0201" CAP_0201 44.738,12.386 r270 bottom value=100nF
C71 "100n 0201" CAP_0201 43.438,12.383 r270 bottom value=100nF
C72 "100n 0201" CAP_0201 44.753,13.676 r270 bottom value=100nF
C73 "100n 0201" CAP_0201 44.081,13.676 r270 bottom value=100nF
C74 "100n 0201" CAP_0201 43.448,13.684 r270 bottom value=100nF
C75 "100n 0201" CAP_0201 42.806,13.686 r270 bottom value=100nF
C76 "100n 0201" CAP_0201 44.106,15.001 r270 bottom value=100nF
C77 "100n 0201" CAP_0201 44.78,15.001 r270 bottom value=100nF
C78 "100n 0201" CAP_0201 45.406,13.671 r270 bottom value=100nF
C79 "100n 0201" CAP_0201 42.157,15.002 r90 bottom value=100nF
C80 "100n 0201" CAP_0201 42.847,15.048 r270 bottom value=100nF
C81 "100n 0201" CAP_0201 43.453,15.006 r270 bottom value=100nF
C82 "100n 0201" CAP_0201 39.84,14.005 r180 bottom value=100nF
C84 "100n 0201" CAP_0201 41.482,14.994 r90 bottom value=100nF
C85 "100n 0201" CAP_0201 45.422,14.998 r270 bottom value=100nF
C86 "1uF 0603" FP-GRM188-0_15-MFG 27.156,1.81 r180 top value=1uF
C87 "22uF GRM188R60J226MEA0J" FP-GRM188-0_2-IPC_C 47,45.5 r0 top value=22uF
C88 "100n" CAP_0402 30.961,52.647 r90 bottom value=100nF
C89 "22uF GRM188R60J226MEA0J" FP-GRM188-0_2-IPC_C 52,45.5 r0 top value=22uF
C90 "10uF GRM188R61A106ME69D" FP-GRM188-0_15-MFG 36.5,43 r270 bottom value=10uF
C92 "100n" CAP_0402 36.579,13.468 r180 bottom value=100nF
C93 "100n 0201" CAP_0201 43.774,11.404 r180 bottom value=100nF
C94 "100n 0201" CAP_0201 42.796,11.067 r270 bottom value=100nF
C95 "100n" CAP_0402 58.571,5.573 r180 top value=100nF
C96 "10uF GRM188R61A106ME69D" FP-GRM188-0_15-MFG 58.462,7.474 r0 top value=10uF
C97 "1uF 0805" CAPC2013X145X50NL20T20 51.5,3.325 r270 top value=1uF
C98 "20p" CAP_0402 52.35,3.825 r0 bottom value=20pF
C99 "10uF GRM188R61A106ME69D" FP-GRM188-0_15-MFG 35.399,9.106 r180 bottom value=10uF
C100 "100n 0201" CAP_0201 38.891,11.1 r270 bottom value=100nF
C101 "1uF 0805" CAPC2013X145X50NL20T20 53.703,3.301 r270 top value=1uF
C102 "10uF GRM188R61A106ME69D" FP-GRM188-0_15-MFG 51.863,27.018 r0 top value=10uF
C103 "220n" CAP_0402 44.164,31.349 r90 bottom value=220nF
C104 "1uF 50V 1206" FP-1206-L_3_2_0_2-W_1_6_0-IPC_B 42.418,37.189 r90 top value=1uF
C105 "10uF GRM188R61A106ME69D" FP-GRM188-0_15-MFG 52,40.5 r180 top value=10uF
C106 "10uF GRM188R61A106ME69D" FP-GRM188-0_15-MFG 47.116,34.777 r0 top value=10uF
C107 "220n" CAP_0402 41.161,37.059 r270 bottom value=220nF
C109 "100n" CAP_0402 42.133,46.51 r270 top value=100nF
C111 "20p" CAP_0402 29.676,37.517 r0 top value=20pF
C112 "20p" CAP_0402 31.513,37.512 r0 top value=20pF
CB1 "10uF GRM188R61A106ME69D" FP-GRM188-0_15-MFG 33,8 r180 bottom value=10uF
CB2 "100n 0201" CAP_0201 37.935,11.396 r180 bottom value=100nF
CT1 "NF" CAP_0402 37.746,53.181 r0 top
D1 "KT-0603R" FP-SML-LX0603IW-TR-MFG 53.758,31.374 r90 bottom
D2 "DSK24" DSK24 26.908,15.686 r0 bottom
D3 "PRTR5V0U2F,115" FP-SOT886-MFG 34.192,18.24 r0 top value=1pF
D4 "PRTR5V0U2F,115" FP-SOT886-MFG 33.939,43.656 r0 bottom value=1pF
D5 "PRTR5V0U2F,115" FP-SOT886-MFG 50.252,20.43 r180 top value=1pF
D7 "DSK24" DSK24 48.03,30.023 r90 top
D8 "DSK24" DSK24 44.769,37.268 r90 top
FB1 "BLM18PG121SN1D" FP-BLM18-0_15-t0_8-IPC_B 50.5,12 r90 top
FB2 "BLM18PG121SN1D" FP-BLM18-0_15-t0_8-IPC_B 50.132,17.365 r270 top
FB3 "BLM18PG121SN1D" FP-BLM18-0_15-t0_8-IPC_B 55.925,12.925 r270 top
FB4 "BLM18PG121SN1D" FP-BLM18-0_15-t0_8-IPC_B 55.5,2.5 r270 top
J1 "Connector 2PIn" CON_2P 43.5,29 r90 top
J2 "Connector 2PIn" CON_2P 43.159,34.029 r180 top
J3 "Connector 2PIn" CON_2P 1,44.8 r270 top
J4 "05b20l22p" FLEX_CON_22P 41.589,3.323 r180 bottom
J5 "05b20l22p" FLEX_CON_22P 41.509,3.381 r0 top
J6 "Connector 2PIn" CON_2P 4,44.8 r270 top
J7 "Connector 2PIn" CON_2P 7,44.8 r270 top
J8 "Connector 2PIn" CON_2P 10,44.8 r270 top
J9 "Connector 2PIn" CON_2P 13,44.8 r270 top
J10 "Connector 2PIn" CON_2P 16,44.8 r270 top
J11 "Connector 2PIn" CON_2P 19,44.8 r270 top
J12 "Connector 2PIn" CON_2P 22,44.8 r270 top
JB1 "Connector 2PIn" CON_2P 59.245,33.623 r90 top
JB2 "Connector 2PIn" CON_2P 59.255,30.261 r270 top
JT "Connector 2PIn" CON_2P 59.243,27.144 r270 top
L1 "DFE201612E-R47M=P2" FP-DFE201612C-IPC_C 57.946,37.35 r90 top value=0.47uH
L2 "DFE201612E-R47M=P2" FP-DFE201612C-IPC_C 58.019,43.355 r90 top value=0.47uH
L3 "DFE201612E-R47M=P2" FP-DFE201612C-IPC_C 53.09,36.355 r270 top value=0.47uH
L4 "DFE201612E-R47M=P2" FP-DFE201612C-IPC_C 47,43 r270 top value=0.47uH
L5 "DFE201612E-R47M=P2" FP-DFE201612C-IPC_C 52,43 r270 top value=0.47uH
L6 "DFE252012F-100M=P2" FP-DFE252012C-IPC_B 50.695,30.039 r90 top value=10uH
L7 "DFE252012F-100M=P2" FP-DFE252012C-IPC_B 47.5,37.5 r90 top value=10uH
LED1 "xl-hd3535uwc-a2" XL-HD3535UWC-A2 2.5,63 r90 top
LED2 "xl-hd3535uwc-a2" XL-HD3535UWC-A2 2.5,31 r90 top
LED3 "jnj-ltji0112w120/35mil/845-860nm" JNJ-LTJI0112W120 2.5,36 r270 top
LED4 "xl-hd3535uwc-a2" XL-HD3535UWC-A2 8.5,63 r90 top
LED5 "xl-hd3535uwc-a2" XL-HD3535UWC-A2 8.5,31 r90 top
LED6 "jnj-ltji0112w120/35mil/845-860nm" JNJ-LTJI0112W120 8.5,58 r90 top
LED7 "jnj-ltji0112w120/35mil/845-860nm" JNJ-LTJI0112W120 8.5,36 r270 top
LED8 "xl-hd3535uwc-a2" XL-HD3535UWC-A2 14.5,63 r90 top
LED9 "xl-hd3535uwc-a2" XL-HD3535UWC-A2 14.5,31 r90 top
LED10 "jnj-ltji0112w120/35mil/845-860nm" JNJ-LTJI0112W120 14.5,58 r90 top
LED11 "jnj-ltji0112w120/35mil/845-860nm" JNJ-LTJI0112W120 14.5,36 r270 top
LED12 "xl-hd3535uwc-a2" XL-HD3535UWC-A2 20.5,63 r90 top
LED13 "xl-hd3535uwc-a2" XL-HD3535UWC-A2 20.5,31 r90 top
LED14 "jnj-ltji0112w120/35mil/845-860nm" JNJ-LTJI0112W120 20.5,58 r90 top
LED15 "jnj-ltji0112w120/35mil/845-860nm" JNJ-LTJI0112W120 20.5,36 r270 top
LED16 "jnj-ltji0112w120/35mil/845-860nm" JNJ-LTJI0112W120 2.5,58 r90 top
PR1 "CON6P" CON6P 30.838,41.146 r90 bottom
Q1 "AO3401A" FP-SOT23-IPC_B 36.5,27 r180 top
Q2 "AO3400A" FP-SOT23-MFG 40.5,27 r180 top
Q4 "AO3400A" FP-SOT23-MFG 35.622,35.799 r0 top
R1 "5.1k" RES_0402 29.34,19.437 r0 bottom value=5.1kOhm
R2 "10k" RES_0402 36.594,12.334 r180 bottom value=10kOhm
R3 "10k" RES_0402 49.379,27 r0 top value=10kOhm
R4 "5.1k" RES_0402 55.167,19.02 r180 bottom value=5.1kOhm
R5 "1.5k" RES_0402 53.137,27.595 r270 bottom value=1.5kOhm
R6 "100k" RES_0402 39.675,20.075 r0 bottom value=100kOhm
R7 "1k" RES_0402 56.943,28.712 r270 bottom value=1kOhm
R8 "100k" RES_0402 54.667,28.913 r270 bottom value=100kOhm
R9 "5.1k" RES_0402 55.285,22.138 r180 bottom value=5.1kOhm
R10 "10k" RES_0402 34.808,13.416 r0 bottom value=10kOhm
R11 "5.1k" RES_0402 29.408,16.768 r0 bottom value=5.1kOhm
R12 "1.5k" RES_0402 55.382,32.506 r0 bottom value=1.5kOhm
R13 "10k" RES_0402 32.145,2.429 r90 bottom value=10kOhm
R14 "4.7k" RES_0402 32.177,4.21 r270 bottom value=4.7kOhm
R15 "4.7k" RES_0402 32.188,6.013 r90 bottom value=4.7kOhm
R16 "10k" RES_0402 54.113,5.555 r90 bottom value=10kOhm
R17 "4.7k" RES_0402 52.593,5.568 r90 bottom value=4.7kOhm
R18 "4.7k" RES_0402 51.029,5.587 r90 bottom value=4.7kOhm
R19 "100k" RES_0402 49.456,47.123 r180 top value=100kOhm
R20 "100k" RES_0402 36.587,16.267 r0 bottom value=100kOhm
R21 "47k" RES_0402 57.651,26.523 r90 top value=47kOhm
R22 "511k" RES_0402 50.685,37.504 r90 bottom value=511kOhm
R23 "100k" RES_0402 42.144,44.794 r90 top value=100kOhm
R24 "91k" RES_0402 50.41,35.812 r90 bottom value=91kOhm
R25 "33k" RES_0402 57.379,38.73 r180 bottom value=33kOhm
R26 "100k" RES_0402 57.473,44.914 r180 bottom value=100kOhm
R27 "100k" RES_0402 49.686,40.477 r180 top value=100kOhm
R28 "100k" RES_0402 49.5,45.5 r180 top value=100kOhm
R29 "120k" RES_0402 59.033,44.923 r180 bottom value=120kOhm
R30 "100k" RES_0402 38.511,36.908 r180 top value=100kOhm
R31 "10k" RES_0402 36.825,19.972 r90 bottom value=10kOhm
R32 "100k" RES_0402 45.798,47.092 r0 top value=100kOhm
R33 "240R" RES_0402 45.94,20.042 r0 bottom value=240Ohm
R34 "10k" RES_0402 43.399,42.882 r90 top value=10kOhm
R35 "100k" RES_0402 34.349,47.71 r180 bottom value=100kOhm
R36 "10k" RES_0402 42.031,42.882 r90 top value=10kOhm
R37 "200R" RES_0402 50.4,10.325 r180 top value=200Ohm
R38 "100k" RES_0402 25.77,50.107 r270 top value=100kOhm
R39 "10k" RES_0402 30.5,10.65 r270 bottom value=10kOhm
R40 "10k" RES_0402 27.975,10.65 r270 bottom value=10kOhm
R41 "10k" RES_0402 29.925,3.5 r180 bottom value=10kOhm
R42 "22R" RES_0402 32.735,8.862 r180 top value=22Ohm
R43 "10k" RES_0402 25.446,48.492 r0 top value=10kOhm
R44 "10k" RES_0402 25.43,47.134 r0 top value=10kOhm
R45 "100k" RES_0402 42.275,21.375 r0 bottom value=100kOhm
R46 "240R" RES_0402 44.86,21.025 r180 bottom value=240Ohm
R47 "240R" RES_0402 44.382,20.034 r0 bottom value=240Ohm
R48 "240R" RES_0402 42.813,19.717 r90 bottom value=240Ohm
R49 "100k" RES_0402 59.013,38.707 r180 bottom value=100kOhm
R50 "511k" RES_0402 44.785,43.841 r90 bottom value=511kOhm
R51 "100k" RES_0402 54.986,39.517 r180 bottom value=100kOhm
R52 "240R" RES_0402 40.5,34.999 r270 bottom value=240Ohm
R53 "100k" RES_0402 36.594,15.225 r180 bottom value=100kOhm
R54 "22R" RES_0402 36.56,22.694 r90 bottom value=22Ohm
R55 "91k" RES_0402 44.545,42.113 r90 bottom value=91kOhm
R56 "51k" RES_0402 49.788,43.788 r90 bottom value=51kOhm
R57 "10k" RES_0402 25.419,45.788 r0 top value=10kOhm
R58 "100k" RES_0402 37.5,26.5 r90 bottom value=100kOhm
R59 "200k" RES_0402 36,26.5 r90 bottom value=200kOhm
R60 "100k" RES_0402 43.304,26.25 r0 top value=100kOhm
R61 "100k" RES_0402 36,24.575 r90 bottom value=100kOhm
R62 "200R" RES_0402 38.466,14.66 r180 bottom value=200Ohm
R63 "30k" RES_0402 38.142,13.346 r180 bottom value=30kOhm
R64 "10k" RES_0402 36.825,17.645 r90 bottom value=10kOhm
R65 "10k" RES_0402 25.43,44.441 r0 top value=10kOhm
R66 "3R" FP-SR0603-MFG 45.706,30.265 r270 bottom value=3Ohm
R67 "10k" RES_0402 45.824,32.99 r0 top value=10kOhm
R68 "1.5R" FP-SR0603-MFG 42.461,37.504 r270 bottom value=1.5Ohm
R69 "20k" RES_0402 49.597,42.053 r90 bottom value=20kOhm
R70 "10k" RES_0402 25.441,43.089 r0 top value=10kOhm
R71 "1M" RES_0402 43.805,44.827 r90 top value=1MOhm
R72 "1M" RES_0402 43.816,46.51 r90 top value=1MOhm
R73 "4.7k" RES_0402 38.159,29.319 r0 bottom value=4.7kOhm
R74 "4.7k" RES_0402 34.955,31.263 r270 bottom value=4.7kOhm
R76 "100k" RES_0402 28.899,49.584 r90 bottom value=100kOhm
RB1 "47k" RES_0402 54.517,12.705 r90 top value=47kOhm
RB2 "47k" RES_0402 54.5,11 r90 top value=47kOhm
RB3 "47k" RES_0402 32.5,31 r90 top value=47kOhm
RB4 "47k" RES_0402 29.883,32.519 r90 top value=47kOhm
RB5 "47k" RES_0402 54.767,50.514 r270 top value=47kOhm
RB6 "47k" RES_0402 54.5,48.5 r270 top value=47kOhm
RBT1 "10k" RES_0402 39.129,38.356 r90 bottom
RD1 "1.5k" RES_0402 51.913,11.74 r90 top value=1.5kOhm
RD2 "1.5k" RES_0402 53.709,7.003 r180 bottom value=1.5kOhm
S1 "S2B-PH-K-S(LF)(SN)" JST-S2B-PH-K-S_V 55.672,11.933 r270 bottom
S2 "S2B-PH-K-S(LF)(SN)" JST-S2B-PH-K-S_V 29,31 r90 bottom
S3 "S2B-PH-K-S(LF)(SN)" JST-S2B-PH-K-S_V 55.5,50 r270 bottom
U1 "BQ24072TRGTR" RGT0016C_V 56.1,29.75 r180 top
U2 "ch340x" ch340x 35,13 r180 top
U3 "k230d" K230D 37.192,8.195 r0 top
U5 "TPS63802DLAR" FP-DLA0010A-MFG 52.853,36.516 r0 bottom
U6 "TPS62823DLCR" FP-DLC0008A-MFG 57.515,36.495 r180 bottom
U7 "TPS62823DLCR" FP-DLC0008A-MFG 57.56,42.631 r180 bottom
U8 "TPS63802DLAR" FP-DLA0010A-MFG 47,43 r0 bottom
U10 "TPS63802DLAR" FP-DLA0010A-MFG 52,43 r0 bottom
U11 "ai-m62-cbs(blifn4)" AI-M62-CBS 26.921,52.647 r270 top
U13 "msm381acb026" mems 57.533,2.647 r0 top
U14 "TPS61161DRVR" TPS61160ADRVT 48,30 r0 bottom
U15 "TPS61161DRVR" TPS61160ADRVT 44.621,37.363 r0 bottom
U16 "w25n02kvzeir" w25n02 28.106,0.719 r270 top
U17 "AHT20" AHT30 37.597,31.795 r180 bottom
USBC1 "type-c-31-m-12" TYPE-C-31-M-12 57.118,20.564 r90 top
USBC2 "type-c-31-m-12" TYPE-C-31-M-12 27.267,18.073 r270 top
Y1 "Q13FC13500004" FP-ABS07-MFG 42.673,23.147 r180 top
Y2 "XL7EL89CKI-111YLC-24M" FP-XRCGB_F_N-MFG 38.719,23.262 r0 top
Y3 "Q13FC13500004" FP-ABS07-MFG 30.5,35.5 r0 top

## Footprints (in the part's own frame and the unit in brackets; to place one, negate y for a bottom-side part, rotate by r counter-clockwise, add the part's x,y. Pads: shape width x height; smd on the part's side, far side on the other; paste and mask are expansions set on the pad)
AHT30 [mil]
  rect 29.5x19.7 smd: 1(-39.4,44.4) 2(-39.4,5) 3(-39.4,-34.4) 4(39.4,-34.4) 5(39.4,5) 6(39.4,44.4)
  silkscreen extent -65,-60 65,70, body extent -59,-54 59,64, height 31
AI-M62-CBS [mil]
  rect 63x23.6 smd paste+0 mask+2: 1(56.3,444.9) 2(56.3,409.5) 3(56.3,374) 4(56.3,338.6) 5(56.3,303.2) 6(56.3,267.7) 7(56.3,232.3) 8(56.3,196.9) 9(56.3,161.4) 10(56.3,126) 11(56.3,90.6) 23(528.7,90.6) 24(528.7,126) 25(528.7,161.4) 26(528.7,196.9) 27(528.7,232.3) 28(528.7,267.7) 29(528.7,303.2) 30(528.7,338.6) 31(528.7,374) 32(528.7,409.5) 33(528.7,444.9)
  rect 23.6x63 smd paste+0 mask+2: 12(115.3,31.5) 13(150.8,31.5) 14(186.2,31.5) 15(221.6,31.5) 16(257.1,31.5) 17(292.5,31.5) 18(327.9,31.5) 19(363.4,31.5) 20(398.8,31.5) 21(434.2,31.5) 22(469.7,31.5) 34(469.7,503.9) 35(434.2,503.9) 36(398.8,503.9) 37(363.4,503.9) 38(327.9,503.9) 39(292.5,503.9) 40(257.1,503.9) 41(221.6,503.9) 42(186.2,503.9) 43(150.8,503.9) 44(115.3,503.9)
  round 47.2 smd paste+0 mask+2: 45(194.5,222.1)
  silkscreen extent 0,28 528,503, body extent 54,34 526,506, height 79
CAP_0201 [mm]
  rect 0.28x0.3 smd paste+0 mask+0: 1(-0.264,-0.001) 2(0.266,-0.001)
  body extent -0.3,-0.15 0.3,0.15, height 0.33
CAP_0402 [mm]
  rect 0.515x0.472 smd paste+0 mask+0: 1(-0.378,0.004) 2(0.379,0.004)
  body extent -0.5,-0.25 0.5,0.25, height 0.37
CAPC2013X145X50NL20T20 [mm] "Chip Capacitor, 2-Leads, Body 2.00x1.25mm, IPC Medium Density"
  rect 1.25x1.45 smd: 1(-0.825,0) 2(0.825,0)
  body extent -1,-0.68 1,0.62, height 1.31
ch340x [mil]
  oval 11x63.8 smd: 1(-40.8,-88.1) 2(-21.1,-88.1) 3(-1.4,-88.1) 4(18.3,-88.1) 5(38,-88.1) 6(38,78) 7(18.3,78) 8(-1.4,78) 9(-21.1,78) 10(-40.8,78)
  silkscreen extent -70,-94 61,37, body extent -60,-104 58,93, height 43
CON6P [mm]
  round 1 smd: 1(0,0) 2(2,0) 3(4,0) 4(6,0) 5(8,0) 6(10,0)
CON_2P [mm]
  round 1 hole 0.6: 1(-0.825,0.004) 2(0.787,0)
DSK24 [mil]
  rect 37.4x45.3 smd: 1(-66.3,-2.2) 2(67,-2.2)
  silkscreen extent -62,-36 56,32, body extent -75,-38 71,33, height 38
FLEX_CON_22P [mil]
  rect 11.8x51.2 smd paste+0 mask+2: 1(-204.9,91.3) 2(-185.2,91.3) 3(-165.6,91.3) 4(-145.9,91.3) 5(-126.2,91.3) 6(-106.5,91.3) 7(-86.8,91.3) 8(-67.1,91.3) 9(-47.4,91.3) 10(-27.8,91.3) 11(-8.1,91.3) 12(11.6,91.3) 13(31.3,91.3) 14(51,91.3) 15(70.7,91.3) 16(90.4,91.3) 17(110,91.3) 18(129.7,91.3) 19(149.4,91.3) 20(169.1,91.3) 21(188.8,91.3) 22(208.5,91.3)
  rect 78.7x118.1 smd paste+0 mask+2: 23(273.4,-1.2) 24(-269.9,-1.2)
  silkscreen extent -325,-90 328,124, body extent -300,-92 306,109, height 79
FP-1206-L_3_2_0_2-W_1_6_0-IPC_B [mm]
  rect 1.305x1.806 smd paste+0 mask+0: 1(-1.401,0) 2(1.401,0)
  silkscreen extent -0.45,-0.9 0.45,0.9, body extent -2.3,-1.15 2.3,1.15, height 0.25
FP-ABS07-MFG [mm]
  rect 1.1x1.9 smd paste+0 mask+0: 1(-1.25,0) 2(1.25,0)
  silkscreen extent -0.33,-0.8 0.33,0.8, body extent -1.9,-1.05 1.9,1.05, height 0.25
FP-BLM18-0_15-t0_8-IPC_B [mm]
  rect 1.106x0.958 smd paste+0 mask+0: 1(-0.676,0) 2(0.676,0)
  silkscreen extent -1.23,-0.88 1.23,0.88, body extent -1.48,-0.73 1.48,0.73, height 0.25
FP-DFE201612C-IPC_C [mm]
  rect 1.154x1.706 smd paste+0 mask+0: 1(-0.676,0) 2(0.676,0)
  silkscreen extent -1.25,-1.3 1.25,1.3, body extent -1.35,-1 1.35,1, height 0.25
FP-DFE252012C-IPC_B [mm]
  rect 1.355x2.206 smd paste+0 mask+0: 1(-1.026,0) 2(1.026,0)
  silkscreen extent -1.7,-1.5 1.7,1.5, body extent -1.95,-1.35 1.95,1.35, height 0.25
FP-DLA0010A-MFG [mm]
  rrect40% 0.6x0.25 smd paste+0 mask+0: 1(-0.9,1) 2(-0.9,0.5) 3(-0.9,0) 4(-0.9,-0.5) 5(-0.9,-1)
  rrect40% 0.9x0.25 smd paste+0 mask+0: 6(0.75,-1) 7(0.75,-0.5) 9(0.75,0.5) 10(0.75,1)
  rrect40% 1.3x0.25 smd paste-1000 mask+0: 8(0.55,0)
  silkscreen extent -1.92,-1.55 1.05,1.55, body extent -1,-1.5 1,1.5, height 1
FP-DLC0008A-MFG [mm]
  rrect40% 0.55x0.25 smd paste+0 mask+0: 1(-0.675,0.75) 2(-0.675,0.25) 3(-0.675,-0.25) 4(-0.675,-0.75) 5(0.675,-0.75) 6(0.675,-0.25) 7(0.675,0.25) 8(0.675,0.75)
  silkscreen extent -1.75,-1.39 0.8,1.38, body extent -0.75,-1 0.75,1, height 1
FP-GRM188-0_2-IPC_C [mm]
  rect 0.905x0.906 smd paste+0 mask+0: 1(-0.601,0) 2(0.601,0)
  silkscreen extent -1.05,-0.9 1.05,0.9, body extent -1.15,-0.6 1.15,0.6, height 0.25
FP-GRM188-0_15-MFG [mm]
  rect 0.75x0.9 smd paste+0 mask+0: 1(-0.775,0) 2(0.775,0)
  silkscreen extent -0.8,-0.8 0.8,0.8, body extent -0.8,-0.4 0.8,0.4, height 0.95
FP-SML-LX0603IW-TR-MFG [mm]
  rect 0.8x0.8 smd paste+0 mask+0: 1(-0.75,0) 2(0.75,0)
  silkscreen extent -1.85,-0.73 0.8,0.75, body extent -0.8,-0.4 0.8,0.4, height 0.85
FP-SOT23-IPC_B [mm]
  rect 1.359x0.587 smd paste+0 mask+0: 1(-0.927,0.915)
  rrect100% 1.359x0.587 smd paste+0 mask+0: 2(-0.927,-0.915) 3(0.927,0)
  silkscreen extent 0.13,-1.45 0.65,1.45, body extent -1.86,-1.7 1.86,1.7, height 0.25
FP-SOT23-MFG [mm]
  rect 0.9x0.8 smd paste+0 mask+0: 1(-1,0.95) 2(-1,-0.95) 3(1,0)
  silkscreen extent -0.7,-1.5 0.7,1.5, body extent -1.55,-1.6 1.55,1.6, height 0.25
FP-SOT886-MFG [mm]
  rect 0.325x0.27 smd paste+0 mask+0: 1(-0.337,0.5) 2(-0.337,0) 3(-0.337,-0.5) 4(0.337,-0.5) 5(0.337,0) 6(0.337,0.5)
  silkscreen extent -1.17,-1.01 0.53,1.01, body extent -0.63,-0.85 0.63,0.85, height 0.25
FP-SR0603-MFG [mm]
  rect 0.9x0.8 smd paste+0 mask+0: 1(-0.85,0) 2(0.85,0)
  silkscreen extent -0.03,-0.45 0.03,0.45, body extent -0.82,-0.41 0.78,0.39, height 0.55
FP-XRCGB_F_N-MFG [mm]
  rect 0.75x0.7 smd paste+0 mask+0: 1(-0.675,-0.5) 2(0.675,-0.5) 3(0.675,0.5) 4(-0.675,0.5)
  silkscreen extent -1.72,-1.22 1.05,1.22, body extent -1.15,-0.95 1.15,0.95, height 0.25
IFA_MAGUS [mm]
  rect 0.599x0.4 smd paste+0 mask+0.102: 1(4.978,-3.14)
  rect 1.05x0.4 smd paste+0 mask+0.102: 2(1.603,-2.644)
  rect 1x0.4 smd paste+0 mask+0.102: 2(3.788,-2.644)
  Top Layer region: -5,2.307 2.36,2.307 2.36,4.401 -5,4.401
  Top Layer region: 1.569,-0.675 3.829,-0.675 3.829,0.125 1.569,0.125
  Top Layer region: -6.3,-2.084 4.295,-2.084 4.295,-1.2 -6.3,-1.2
  Top Layer region: -6.3,-1.5 -4.8,-1.5 -4.8,4.401 -6.3,4.401
  Top Layer region: 3.291,-2.459 4.295,-2.459 4.295,-2.072 3.291,-2.072
  Top Layer region: 1.083,-2.478 2.134,-2.478 2.134,-2.066 1.083,-2.066
  Top Layer region: 2.34,0 3.074,0 3.074,4.401 2.34,4.401
  Top Layer region: 3.057,3.151 17.524,3.151 17.524,4.401 3.057,4.401
  Top Layer region: 3.796,-0.28 4.81,-0.942 4.81,-2.675 4.677,-2.945 5.277,-2.945 5.135,-2.675 5.135,-0.813 3.796,0.121
JNJ-LTJI0112W120 [mm]
  rect 0.559x3.299 smd: 1(1.471,0) 3(-1.471,0)
  round 0.35 hole 0.2: 2(-0.381,0) 2(-0.381,-1.397) 2(-0.356,1.407) 2(0.381,1.397) 2(0.381,0) 2(0.381,-1.397)
  rect 1.3x3.299 smd: 2(0,0)
  rect 1.3x3.299 smd far side: 2(0,0)
  silkscreen extent -2.25,-1.98 2.25,2, body extent -1.76,-1.77 1.74,1.74, height 2.1
JST-S2B-PH-K-S_V [mm] "THD, 2-Leads, Body 7.6x5.9mm, Pitch 2mm"
  rect 1.2x1.2 hole 0.7: 1(-1,2.45)
  round 1.2 hole 0.7: 2(1,2.45)
  silkscreen extent -2.95,-3.8 2.95,4.35, body extent -2.95,-3.8 2.95,3.8, height 4.8
K230D [mil]
  round 17.72 smd paste-2 mask-1.5: A1(41.6,49.3) A2(41.6,74.8) A3(41.6,100.4) A4(41.6,126) A5(41.6,151.6) A6(41.6,177.2) A7(41.6,202.8) A8(41.6,228.4) A9(41.6,254) A10(41.6,279.6) A11(41.6,305.2) A12(41.6,330.8) A13(41.6,356.3) A14(41.6,381.9) A15(41.6,407.5) A16(41.6,433.1) B1(67.2,49.3) B2(67.2,74.8) B3(67.2,100.4) B4(67.2,126) B5(67.2,151.6) B6(67.2,177.2) B7(67.2,202.8) B8(67.2,228.4) B9(67.2,254) B10(67.2,279.6) B11(67.2,305.2) B12(67.2,330.8) B13(67.2,356.3) B14(67.2,381.9) B15(67.2,407.5) B16(67.2,433.1) C1(92.8,49.3) C2(92.8,74.8) C3(92.8,100.4) C4(92.8,126) C5(92.8,151.6) C6(92.8,177.2) C7(92.8,202.8) C8(92.8,228.4) C9(92.8,254) C10(92.8,279.6) C11(92.8,305.2) C12(92.8,330.8) C13(92.8,356.3) C14(92.8,381.9) C15(92.8,407.5) C16(92.8,433.1) D1(118.4,49.3) D2(118.4,74.8) D3(118.4,100.4) D4(118.4,126) D5(118.4,151.6) D6(118.4,177.2) D7(118.4,202.8) D8(118.4,228.4) D9(118.4,254) D10(118.4,279.6) D11(118.4,305.2) D12(118.4,330.8) D13(118.4,356.3) D14(118.4,381.9) D15(118.4,407.5) D16(118.4,433.1) E1(144,49.3) E2(144,74.8) E3(144,100.4) E4(144,126) E5(144,151.6) E6(144,177.2) E7(144,202.8) E8(144,228.4) E9(144,254) E10(144,279.6) E11(144,305.2) E12(144,330.8) E13(144,356.3) E14(144,381.9) E15(144,407.5) E16(144,433.1) F1(169.6,49.3) F2(169.6,74.8) F3(169.6,100.4) F4(169.6,126) F5(169.6,151.6) F6(169.6,177.2) F7(169.6,202.8) F8(169.6,228.4) F9(169.6,254) F10(169.6,279.6) F11(169.6,305.2) F12(169.6,330.8) F13(169.6,356.3) F14(169.6,381.9) F15(169.6,407.5) F16(169.6,433.1) G1(195.1,49.3) G2(195.1,74.8) G3(195.1,100.4) G4(195.1,126) G5(195.1,151.6) G6(195.1,177.2) G7(195.1,202.8) G8(195.1,228.4) G9(195.1,254) G10(195.1,279.6) G11(195.1,305.2) G12(195.1,330.8) G13(195.1,356.3) G14(195.1,381.9) G15(195.1,407.5) G16(195.1,433.1) H1(220.7,49.3) H2(220.7,74.8) H3(220.7,100.4) H4(220.7,126) H5(220.7,151.6) H6(220.7,177.2) H7(220.7,202.8) H8(220.7,228.4) H9(220.7,254) H10(220.7,279.6) H11(220.7,305.2) H12(220.7,330.8) H13(220.7,356.3) H14(220.7,381.9) H15(220.7,407.5) H16(220.7,433.1) J1(246.3,49.3) J2(246.3,74.8) J3(246.3,100.4) J4(246.3,126) J5(246.3,151.6) J6(246.3,177.2) J7(246.3,202.8) J8(246.3,228.4) J9(246.3,254) J10(246.3,279.6) J11(246.3,305.2) J12(246.3,330.8) J13(246.3,356.3) J14(246.3,381.9) J15(246.3,407.5) J16(246.3,433.1) K1(271.9,49.3) K2(271.9,74.8) K3(271.9,100.4) K4(271.9,126) K5(271.9,151.6) K6(271.9,177.2) K7(271.9,202.8) K8(271.9,228.4) K9(271.9,254) K10(271.9,279.6) K11(271.9,305.2) K12(271.9,330.8) K13(271.9,356.3) K14(271.9,381.9) K15(271.9,407.5) K16(271.9,433.1) L1(297.5,49.3) L2(297.5,74.8) L3(297.5,100.4) L4(297.5,126) L5(297.5,151.6) L6(297.5,177.2) L7(297.5,202.8) L8(297.5,228.4) L9(297.5,254) L10(297.5,279.6) L11(297.5,305.2) L12(297.5,330.8) L13(297.5,356.3) L14(297.5,381.9) L15(297.5,407.5) L16(297.5,433.1) M1(323.1,49.3) M2(323.1,74.8) M3(323.1,100.4) M4(323.1,126) M5(323.1,151.6) M6(323.1,177.2) M7(323.1,202.8) M8(323.1,228.4) M9(323.1,254) M10(323.1,279.6) M11(323.1,305.2) M12(323.1,330.8) M13(323.1,356.3) M14(323.1,381.9) M15(323.1,407.5) M16(323.1,433.1) N1(348.7,49.3) N2(348.7,74.8) N3(348.7,100.4) N4(348.7,126) N5(348.7,151.6) N6(348.7,177.2) N7(348.7,202.8) N8(348.7,228.4) N9(348.7,254) N10(348.7,279.6) N11(348.7,305.2) N12(348.7,330.8) N13(348.7,356.3) N14(348.7,381.9) N15(348.7,407.5) N16(348.7,433.1) P1(374.3,49.3) P2(374.3,74.8) P3(374.3,100.4) P4(374.3,126) P5(374.3,151.6) P6(374.3,177.2) P7(374.3,202.8) P8(374.3,228.4) P9(374.3,254) P10(374.3,279.6) P11(374.3,305.2) P12(374.3,330.8) P13(374.3,356.3) P14(374.3,381.9) P15(374.3,407.5) P16(374.3,433.1) R1(399.9,49.3) R2(399.9,74.8) R3(399.9,100.4) R4(399.9,126) R5(399.9,151.6) R6(399.9,177.2) R7(399.9,202.8) R8(399.9,228.4) R9(399.9,254) R10(399.9,279.6) R11(399.9,305.2) R12(399.9,330.8) R13(399.9,356.3) R14(399.9,381.9) R15(399.9,407.5) R16(399.9,433.1) T1(425.5,49.3) T2(425.5,74.8) T3(425.5,100.4) T4(425.5,126) T5(425.5,151.6) T6(425.5,177.2) T7(425.5,202.8) T8(425.5,228.4) T9(425.5,254) T10(425.5,279.6) T11(425.5,305.2) T12(425.5,330.8) T13(425.5,356.3) T14(425.5,381.9) T15(425.5,407.5) T16(425.5,433.1)
  silkscreen extent 5,0 453,461, body extent 18,23 452,457, height 44
mems [mil]
  rect 25.6x21.5 smd: 1(20,55) 2(-17.4,55)
  round 4.4 smd: 3(-15.8,-20.3) 3(-15.8,13.9) 3(18.4,-20.3) 3(18.4,13.9)
  round 19.68 hole 19.68 unplated: HOLE(1.3,-3.32)
  Top Layer region: 32,0.8 31.8,2.3 31.5,3.8 31.1,5.4 30.6,6.9 30.1,8.3 29.5,9.8 28.8,11.2 28,12.6 27.2,13.9 26.3,15.2 25.3,16.4 24.3,17.6 23.2,18.8 22.1,19.8 20.9,20.9 19.7,21.8 18.4,22.7 17,23.5 15.7,24.3 14.3,25 12.8,25.6 11.3,26.1 9.8,26.6 8.3,27 6.8,27.3 5.2,27.5 5.2,16.1 6.5,15.8 7.7,15.5 8.9,15 10.1,14.5 11.2,13.9 12.3,13.2 13.4,12.5 14.3,11.7 15.3,10.8 16.2,9.9 17,8.9 17.7,7.8 18.4,6.7 19,5.6 19.5,4.4 19.9,3.2 20.3,2 20.6,0.8 32,0.8
  Top Layer region: -2.6,27.5 -4.2,27.3 -5.7,27 -7.2,26.6 -8.7,26.1 -10.2,25.6 -11.7,25 -13.1,24.3 -14.4,23.5 -15.8,22.7 -17.1,21.8 -18.3,20.9 -19.5,19.8 -20.6,18.8 -21.7,17.6 -22.7,16.4 -23.7,15.2 -24.6,13.9 -25.4,12.6 -26.2,11.2 -26.9,9.8 -27.5,8.3 -28,6.9 -28.5,5.4 -28.9,3.8 -29.2,2.3 -29.4,0.8 -18,0.8 -17.7,2 -17.3,3.2 -16.9,4.4 -16.4,5.6 -15.8,6.7 -15.1,7.8 -14.4,8.9 -13.6,9.9 -12.7,10.8 -11.7,11.7 -10.8,12.5 -9.7,13.2 -8.6,13.9 -7.5,14.5 -6.3,15 -5.1,15.5 -3.9,15.8 -2.6,16.1 -2.6,27.5
  Top Layer region: -29.4,-7.1 -29.2,-8.7 -28.9,-10.2 -28.5,-11.7 -28,-13.2 -27.5,-14.7 -26.9,-16.1 -26.2,-17.6 -25.4,-18.9 -24.6,-20.3 -23.7,-21.5 -22.7,-22.8 -21.7,-24 -20.6,-25.1 -19.5,-26.2 -18.3,-27.2 -17.1,-28.2 -15.8,-29.1 -14.5,-29.9 -13.1,-30.7 -11.7,-31.3 -10.2,-32 -8.8,-32.5 -7.3,-33 -5.7,-33.3 -4.2,-33.7 -2.6,-33.9 -2.6,-22.5 -3.9,-22.2 -5.1,-21.8 -6.3,-21.4 -7.5,-20.9 -8.6,-20.3 -9.7,-19.6 -10.8,-18.8 -11.7,-18 -12.7,-17.2 -13.6,-16.2 -14.4,-15.2 -15.1,-14.2 -15.8,-13.1 -16.4,-12 -16.9,-10.8 -17.4,-9.6 -17.7,-8.4 -18,-7.1 -29.4,-7.1
  Top Layer region: 5.2,-33.9 6.8,-33.7 8.3,-33.4 9.8,-33 11.3,-32.5 12.8,-32 14.3,-31.3 15.7,-30.7 17,-29.9 18.4,-29.1 19.7,-28.2 20.9,-27.2 22.1,-26.2 23.2,-25.1 24.3,-24 25.3,-22.8 26.3,-21.6 27.2,-20.3 28,-18.9 28.8,-17.6 29.5,-16.1 30.1,-14.7 30.6,-13.2 31.1,-11.7 31.5,-10.2 31.8,-8.7 32,-7.1 20.6,-7.1 20.3,-8.4 19.9,-9.6 19.5,-10.8 19,-12 18.4,-13.1 17.7,-14.2 17,-15.2 16.2,-16.2 15.3,-17.2 14.3,-18 13.4,-18.8 12.3,-19.6 11.2,-20.3 10.1,-20.9 8.9,-21.4 7.7,-21.8 6.5,-22.2 5.2,-22.5 5.2,-33.9
  silkscreen extent -39,-42 41,73, body extent -35,-38 38,71, height 36
RES_0402 [mm]
  rect 0.515x0.472 smd paste+0 mask+0: 1(-0.382,0.006) 2(0.375,0.006)
  body extent -0.5,-0.24 0.5,0.26, height 0.37
RGT0016C_V [mm] "QFN, 16-Leads, Body 3x3mm, Pitch 0.5mm, Thermal Pad 1.65x1.65mm"
  rrect40% 0.6x0.25 smd: 1(-1.4,0.75) 2(-1.4,0.25) 3(-1.4,-0.25) 4(-1.4,-0.75) 9(1.4,-0.75) 10(1.4,-0.25) 11(1.4,0.25) 12(1.4,0.75)
  rrect40% 0.25x0.6 smd: 5(-0.75,-1.4) 6(-0.25,-1.4) 7(0.25,-1.4) 8(0.75,-1.4) 13(0.75,1.4) 14(0.25,1.4) 15(-0.25,1.4) 16(-0.75,1.4)
  rrect50% 1.55x1.55 on Top Paste: 17(0,0)
  rrect6% 1.7x1.7 smd paste-0.85: 17(0,0)
  silkscreen extent -2.35,-1.57 1.57,1.58, body extent -1.51,-1.51 1.51,1.51, height 0.76
TESTP [mm]
  round 0.45 smd mask+0: 1(0,-0.025)
TPS61160ADRVT [mm]
  rrect33% 0.45x0.3 smd: 1(-0.975,0.65) 2(-0.975,0) 3(-0.975,-0.65) 4(0.975,-0.65) 5(0.975,0) 6(0.975,0.65)
  rrect50% 1x0.7 on Bottom Paste: 7(0,-0.45) 7(0,0.45)
  rrect10% 1x1.6 smd paste-0.5: 7(0,0)
  silkscreen extent -1.05,-1.2 1.05,1.2, body extent -0.97,-0.99 1.05,1.01, height 0.81
TYPE-C-31-M-12 [mil]
  oval 47.2x78.7 hole 31.5 slot 59.1 at 90 deg paste-99999 mask+2: 1(165.1,117.7) 4(-175.5,117.7)
  oval 47.2x70.9 hole 31.5 slot 47.2 at 90 deg paste-99999 mask+2: 2(165.1,-46.9) 3(-175.5,-46.9)
  round 11.8 smd: A1B12(-131.2,148) A4B9(-99.7,148)
  rect 11.8x51.2 smd paste-3937 mask+2: A5(-54.4,148) A6(-15,148) A7(4.6,148) A8(44,148) B5(63.7,148) B6(24.3,148) B7(-34.7,148) B8(-74.1,148)
  rect 23.6x51.2 smd paste-3937 mask+2: B1A12(120.8,148) B4A9(89.3,148)
  round 23.62 hole 23.62 unplated: HOLE(-119.73,97.79) HOLE(108.92,98.2)
  Top Layer region: -87.9,122.4 -87.9,173.5 -99.7,173.5 -99.7,173.5 -111.5,173.5 -111.5,122.4 -99.7,122.4 -99.7,122.4 -87.9,122.4
  Top Layer region: -119.4,122.4 -119.4,173.6 -131.2,173.6 -131.2,173.5 -143,173.5 -143,122.4 -131.2,122.4 -131.2,122.4 -119.4,122.4
  silkscreen extent -181,-150 171,70, body extent -181,-147 171,164, height 128
w25n02 [mil]
  rect 39.4x23.6 smd paste+0 mask+2: 1(-417.1,95) 2(-417.1,45) 3(-417.1,-5) 4(-417.1,-55) 5(-110,-55) 6(-110,-5) 7(-110,45) 8(-110,95)
  rect 133.9x169.3 smd paste-12 mask-2: 9(-263.6,20)
  silkscreen extent -449,-98 -106,138, body extent -423,-98 -107,138, height 29
XL-HD3535UWC-A2 [mm]
  rect 0.701x3.299 smd: 1(-1.298,0) 2(1.3,0)
  round 0.35 hole 0.2: 3(-0.508,1.397) 3(-0.508,0) 3(-0.508,-1.397) 3(0,1.397) 3(0,0) 3(0,-1.397) 3(0.508,1.397) 3(0.508,0) 3(0.508,-1.397)
  rect 1.501x3.299 smd: 3(0,0)
  rect 1.501x3.299 smd far side: 3(0,0)
  silkscreen extent -2.79,-1.91 1.91,2.74, body extent -1.73,-1.73 1.73,1.73, height 2

## Part data
C1 C104: library part CMP-04427-010925-1, "C1848", Capacitance=1uF, Case/Package=1206, Dielectric=X7R, Max Operating Temperature=125°C, Min Operating Temperature=-55°C, Package Quantity=2000, Ratings=AEC-Q200, Tolerance=5%, Voltage Rating=50V, Length=0.126inch, Mount="Surface Mount", Packaging="Tape and Reel", RoHS Compliant=Yes, Thickness=0.037inch, Voltage Rating (DC)=50V, Width=0.063inch
C2 C3 C4 C11 C15 C16 C19 C38 C41 C50 C59 C90 C96 C99 C102 C105 C106 CB1: library part CMP-06035-003612-1, "C19702", Capacitance=10uF, Case Code (Imperial)=0603, Case Code (Metric)=1608, Dielectric=X5R, Max Operating Temperature=85°C, Min Operating Temperature=-55°C, Package Quantity=4000, Tolerance=20%, Voltage Rating=10V, Case/Package=0603, Depth=0.8mm, Height=0.8mm, Lead Free="Lead Free", Length=1.6mm, Material=Ceramic, Mount="Surface Mount", Packaging="Tape and Reel", Termination=SMD/SMT, Thickness=0.035inch, Voltage Rating (DC)=10V, Weight=0.000222oz, Width=0.8mm
C5 C6 C7 C8 C9 C23 C24 C32 C88 C92 C95 C109: library part CMP-03422-001116-1, "C307331", Capacitance=100nF, Case Code (Imperial)=0402, Case Code (Metric)=1005, Max Operating Temperature=125°C, Min Operating Temperature=-55°C, Tolerance=10%, Voltage Rating=50V, Case/Package=0402, Mount="Surface Mount", Packaging="Cut Tape", RoHS Compliant=Yes, Series=-
C10 C12 C13 C25 C26 C27 C28 C29 C30 C31 C37 C39 C40 C42 C43 C44 C45 C46 C47 C48 C49 C51 C52 C53 C54 C55 C56 C57 C58 C63 C65 C66 C67 C68 C69 C70 C71 C72 C73 C74 C75 C76 C77 C78 C79 C80 C81 C82 C84 C85 C93 C94 C100 CB2: library part CMP-03422-001116-1, "C2903663", Capacitance=100nF, Manufacturer=Yageo, Manufacturer Part Number=CC0201KRX5R7BB223, Package=CC0201-BA, Temperature="-55°C to +85°C", Temperature Characteristic=X5R, Temperature Coefficient=15%, Temperature Range High=+85°C, Temperature Range Low=-55°C, Tolerance=0.1, Voltage Rating="16 V", Automotive=No, Category=Cap, ComponentLink2Description=Datasheet, ComponentLink2URL=http://www.yageo.com/documents/recent/UPY-GPHC_X5R_4V-to-50V_25.pdf, Device Class L1="Passive Components", Device Class L2=Capacitors, Device Class L3="Ceramic Capacitors", Footprint Url=http://www.yageo.com/exep/pages/download/literatures/UPY-C_GEN_24.pdf, Height=0.33mm, Ipc Land Pattern Name=CAPC6030X30, Lead Free=Yes, Material=Ceramic, Octopart=https://octopart.com/cc0201krx5r7bb223-yageo-90326712, RoHS=TRUE
C14 C17 C18 C20 C87 C89: library part CMP-06035-027361-1, "C59461", Capacitance=22uF, Case Code (Imperial)=0603, Case Code (Metric)=1608, Dielectric=X5R, Max Operating Temperature=85°C, Min Operating Temperature=-55°C, Package Quantity=10000, Tolerance=20%, Voltage Rating=6.3V, Case/Package=0603, Lead Free="Lead Free", Length=0.063inch, Mount="Surface Mount", Packaging="Tape and Reel", Termination=SMD/SMT, Thickness=0.039inch, Voltage Rating (DC)=6.3V, Weight=0.000222oz, Width=0.031inch
C21 C22: library part CMP-03422-001116-1, "C1546", Capacitance=100pF, Case Code (Imperial)=0402, Case Code (Metric)=1005, Max Operating Temperature=125°C, Min Operating Temperature=-55°C, Tolerance=10%, Voltage Rating=50V, Case/Package=0402, Mount="Surface Mount", Packaging="Cut Tape", RoHS Compliant=Yes, Series=-
C33 C34 C98 C111 C112: library part CMP-03422-001116-1, "C1554", Capacitance=20pF, Case Code (Imperial)=0402, Case Code (Metric)=1005, Max Operating Temperature=125°C, Min Operating Temperature=-55°C, Tolerance=10%, Voltage Rating=50V, Case/Package=0402, Mount="Surface Mount", Packaging="Cut Tape", RoHS Compliant=Yes, Series=-
C35 C36: library part CMP-03422-001116-1, "C1547", Capacitance=12pF, Case Code (Imperial)=0402, Case Code (Metric)=1005, Max Operating Temperature=125°C, Min Operating Temperature=-55°C, Tolerance=10%, Voltage Rating=50V, Case/Package=0402, Mount="Surface Mount", Packaging="Cut Tape", RoHS Compliant=Yes, Series=-
C86: library part CMP-06035-003612-1, "C15849", Capacitance=1uF, Case Code (Imperial)=0603, Case Code (Metric)=1608, Dielectric=X5R, Max Operating Temperature=85°C, Min Operating Temperature=-55°C, Package Quantity=4000, Tolerance=20%, Voltage Rating=10V, Case/Package=0603, Depth=0.8mm, Height=0.8mm, Lead Free="Lead Free", Length=1.6mm, Material=Ceramic, Mount="Surface Mount", Packaging="Tape and Reel", Termination=SMD/SMT, Thickness=0.035inch, Voltage Rating (DC)=10V, Weight=0.000222oz, Width=0.8mm
C97 C101: library part CMP-2007-01676-1, "C28323", Capacitance=1uF, Manufacturer=Vitramon, Part Number=VJ0805Y105KXQRW1BC
C103 C107: library part CMP-03422-001116-1, "C16772", Capacitance=220nF, Case Code (Imperial)=0402, Case Code (Metric)=1005, Max Operating Temperature=125°C, Min Operating Temperature=-55°C, Tolerance=10%, Voltage Rating=50V, Case/Package=0402, Mount="Surface Mount", Packaging="Cut Tape", RoHS Compliant=Yes, Series=-
CT1: library part CMP-03422-001116-1, Case Code (Imperial)=0402, Case Code (Metric)=1005, Max Operating Temperature=125°C, Min Operating Temperature=-55°C, Tolerance=10%, Voltage Rating=50V, Case/Package=0402, Mount="Surface Mount", Packaging="Cut Tape", RoHS Compliant=Yes, Series=-
D1: library part CMP-57192-000012-1, "C2286", Case Code (Imperial)=0603, Case Code (Metric)=1608, Color=Red, Forward Current=20mA, Forward Voltage=2V, Lens Color=White, Max Operating Temperature=85°C, Min Operating Temperature=-25°C, Package Quantity=1, Power Dissipation=50mW, Approvals=UL, Case/Package=0603, Diameter=0.061inch, Dominant Wavelength=635nm, Height=0.6mm, Illumination Color=Red, Lead Free="Lead Free", Length=1.6mm, Lens Style=Diffused, Lens Transparency=Diffused, Luminous Intensity=14mcd, Mount="Surface Mount", Number of LEDs=1, Number of Pins=2, Packaging="Tape and Reel", RoHS Compliant=Yes, Test Current=20mA, Viewing Angle=160°, Wavelength=635nm, Width=0.8mm
D2 D7 D8: library part dsk24_c64890, "C22466352", Current - Rectified=2A, JLCPCB Part Class="Extended Part", LCSC Part Name="电压:40V 电流:2A", Manufacturer=MDD(辰达半导体), Operating Junction Temperature Range=-55℃~+150℃, Reverse Leakage Current (Ir)=500uA@40V, Voltage - DC Reverse(Vr)=40V, Voltage - Forward(Vf@If)=550mV@2A, AddInBom=yes, ConvertToPcb=yes, Datasheet=https://item.szlcsc.com/datasheet/DSK24/65960.html, Diode Configuration=Independent, FootprintName=SOD-123_L2.8-W1.8-LS3.7-RD, ManufacturerPart=DSK24, ModelId=560a7cf99d0e44cb9af362aaf5d7923d, ModelName=SOD-123_L2.8-W1.8-LS3.7-RD, ModelTransform=144.8816,62.992,0,0,0,0,0,0,0, Supplier=LCSC, Supplier Footprint=SOD-123FL, SupplierPart=C64890, Symbol="DSK24 K24"
D3 D4 D5: library part CMP-14436-000003-1, "C478118", Ambient Temperature Range High=+85°C, Ambient Temperature Range Low=-40°C, Breakdown Voltage=6V, Capacitance=1pF, Manufacturer=Nexperia, Package=SOT886, Reverse Standoff Voltage=5.5V, Automotive=Yes, Automotive Grade="Grade 3", Category=Diode, ComponentLink2Description=Datasheet, ComponentLink2URL=https://assets.nexperia.com/documents/data-sheet/PRTR5V0U2F_PRTR5V0U2K.pdf, Device Class L1="Circuit Protection", Device Class L2="TVS Diodes", Device Class L3=unset, Digikey Description="TVS DIODE 5.5V 6XSON SOT886", Direction=Unidirectional, Footprint Url=https://assets.nexperia.com/documents/outline-drawing/SOT886.pdf, Height=0.5mm, Lead Free=Yes, Manufacturer Part Number=PRTR5V0U2F,115, Number Of Channels=2, Octopart=https://octopart.com/prtr5v0u2f%2C115-nexperia-78741690, RoHS=TRUE
FB1 FB2 FB3 FB4: library part CMP-0686-00439-3, "C14709", Case Code (Imperial)=0603, Case Code (Metric)=1608, Current Rating=500mA, DC Resistance (DCR)=180mR, Frequency=100MHz, Max Operating Temperature=125°C, Min Operating Temperature=-55°C, Package Quantity=1, Tolerance=25%, Case/Package=0603, Core Material=Ferrite, DC Current=500mA, DC Resistance-Max=180mR, Depth=0.8mm, Height=0.8mm, Impedance=120R, Lead Free="Lead Free", Length=1.6mm, Material=Steel, Max Current Rating=500mA, Max DC Current=500mA, Military Standard=Not, Number of Circuits=1, Number of Lines=1, Number of Pins=2, Packaging="Tape and Reel", Radiation Hardening=No, REACH SVHC="No SVHC", RoHS Compliant=Yes, Series=BLM18A, Shielding=Unshielded, Termination=SMD/SMT, Test Frequency=100MHz, Width=0.8mm
J1 J2 J3 J6 J7 J8 J9 J10 J11 J12 JB1 JB2 JT: library part CON2P
J4 J5: "C22459552", Current Rating (Max)=400mA, JLCPCB Part Class="Extended Part", LCSC Part Name="抽屉式 下接 P数:22P 间距:0.5mm", Manufacturer=HanElectricity(瀚源), ManufacturerPart=05B20L22P, Operating Temperature=-25℃~+85℃, Rated Voltage (Max)=50V, AddInBom=yes, Contact Material="Phosphor bronze", Contact Plating=Tin, Contact Type="Bottom Contact", ConvertToPcb=yes, Datasheet=https://item.szlcsc.com/datasheet/05B20L22P/24136208.html, FFC, FCB Thickness=0.3mm, FootprintName=CONN-SMD_05B20L22P, Height Above Board=2mm, Locking Feature="Slide Lock", Mounting Type="Surface Mount, Right Angle", Number of Contacts=22P, Pitch=0.5mm, Supplier=LCSC, Supplier Footprint=SMD,P=0.5mm,卧贴, SupplierPart=C22459552, SymbolName=05B20L22P
L1 L2 L3 L4 L5: library part CMP-06042-012656-1, "C668312", Inductance=0.47uH
L6 L7: library part CMP-06042-007232-1, "C703141", Case Code (Imperial)=1008, Case Code (Metric)=2520, Current Rating=950mA, DC Resistance (DCR)=480mR, Inductance=10uH, Max Operating Temperature=125°C, Min Operating Temperature=-40°C, Saturation Current=1.6A, Test Frequency=1MHz, Tolerance=20%, Case/Package=1008, Core Material=Ferrite, Height - Seated (Max)=0.047inch, Length=0.098inch, Mount="Surface Mount", Packaging="Tape and Reel", Shielding=Shielded, Width=0.079inch
LED1 LED2 LED4 LED5 LED8 LED9 LED12 LED13: "C3646951", Color Temperature=5500K~7000K, Forward Current=350mA, Illumination Color=White, JLCPCB Part Class="Extended Part", LCSC Part Name=3535球头白1W贴片式发光二极管, Lens Color="Water Clear", Manufacturer=XINGLIGHT(成兴光), ManufacturerPart=XL-HD3535UWC-A2, Operating Temperature=-40℃~+85℃, Power(Watts)=1W, Voltage - Forward(Vf)=2.8V~3.6V, AddInBom=yes, ConvertToPcb=yes, Datasheet=https://item.szlcsc.com/datasheet/XL-HD3535UWC-A2/4213794.html, Diode Configuration="Discrete Diode", FootprintName=LED-SMD_3P-L3.5-W3.5_XL-HD3535UWC-A2-3, Lamp Holder Type="3.5mm x 3.5mm square LED", Luminous Intensity=-, ModelId=24cabb2563c34a16901b89b669d22d94, ModelName=LED-SMD_3P-L3.5-W3.5_XL-HD3535UWC-A2-3, ModelTransform=135.827,135.86587,0,0,0,0,0,0,0, Mounting Style=Top-mount, Peak Wavelength=-, Supplier=LCSC, Supplier Footprint=SMD3535-3P, SupplierPart=C3646951, Symbol=XL-HD3535UWC-A2, Viewing Angle=130°, Wavelength - Dominant=-
LED3 LED6 LED7 LED10 LED11 LED14 LED15 LED16: "C19185834", Current - DC Forward(If)=1A, JLCPCB Part Class="Extended Part", LCSC Part Name=3535白色陶瓷晶元35mil球头120度灯源845-860nm, Manufacturer=JNJOPTO(强生光电), ManufacturerPart=JNJ-LTJI0112W120/35mil/845-860nm, Operating Temperature=-40℃~+100℃, Pd - Power Dissipation=-, Voltage - DC Reverse(Vr)=5V, Voltage - Forward(Vf)=1.4V~2.1V；1.5V~2.3V, AddInBom=yes, ConvertToPcb=yes, Datasheet=https://item.szlcsc.com/datasheet/JNJ-LTJI0112W120%252F35mil%252F845-860nm/20403639.html, FootprintName=LED-SMD_3P-L3.5-W3.5_JNJ-LTJID0114T140, Half wave width=50nm, ModelId=ae706680f6654db0b87a2ee284df6a85, ModelName=LED-SMD_3P-L3.5-W3.5_JNJ-LTJID0114T140, ModelTransform=137.795,138.1887,0,0,0,0,0,0,0, Radiant Intensity=75mW/sr@IF=350mA；140mW/sr@IF=1000mA, Supplier=LCSC, Supplier Footprint=SMD3535-3P, SupplierPart=C19185834, Symbol=JNJ-LTJI0112W120/35MIL/845-860NM, Viewing Angle=120°, Wavelength=850nm
Q1: library part CMP-12801-000081-1, "C15127", Case/Package=TO-236-3, Continuous Drain Current (ID)=2.4A, Drain to Source Voltage (Vdss)=20V, Input Capacitance=156pF, Max Operating Temperature=150°C, Max Power Dissipation=840mW, Min Operating Temperature=-55°C, Mount="Surface Mount", Packaging="Tape and Reel", Rds On Max=160mR